# Altium PCB car_template 2020V3.PcbDoc (part 1 of 2)
Units mm, origin at the board's own origin, x right, y up, seen from the top; angles counter-clockwise.
Board outline 64 x 85 mm, 4 copper layers (Top Side, Ground Plane, Power Plane, Bottom Side), stack 0.844 mm thick; 154 components, 91 nets, 434 pads, 166 vias.
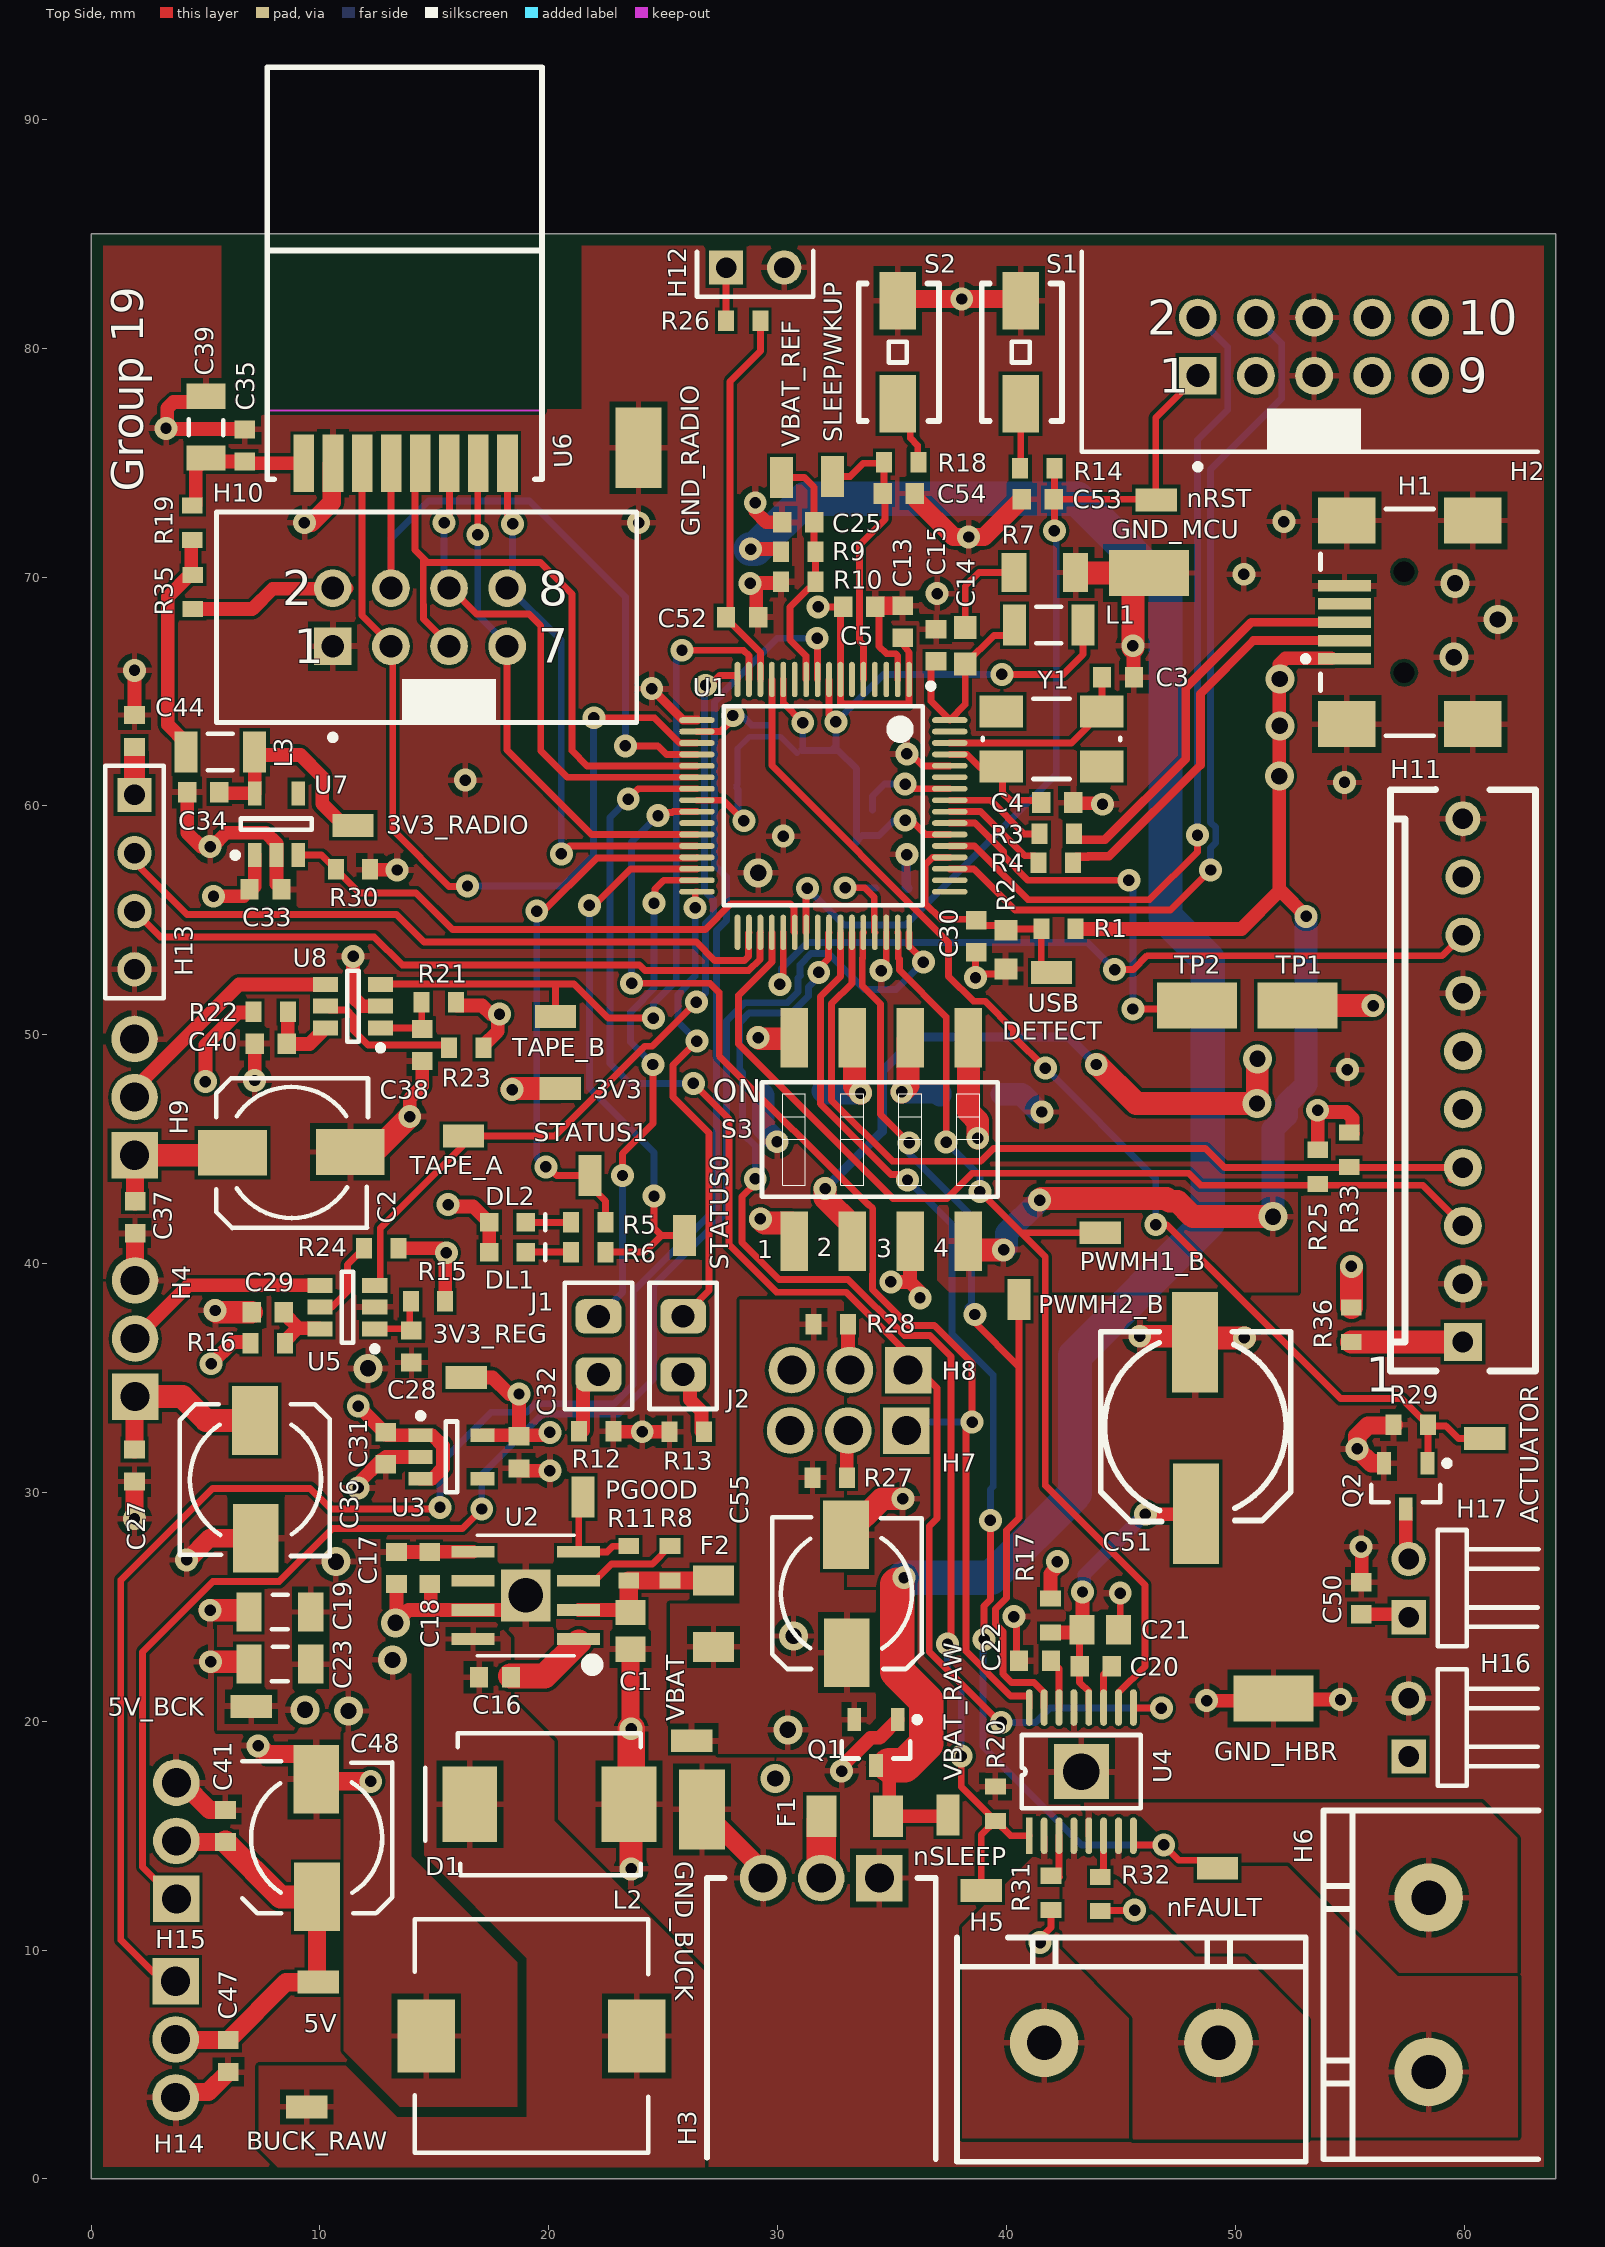
[diagram p0: Top Side view]
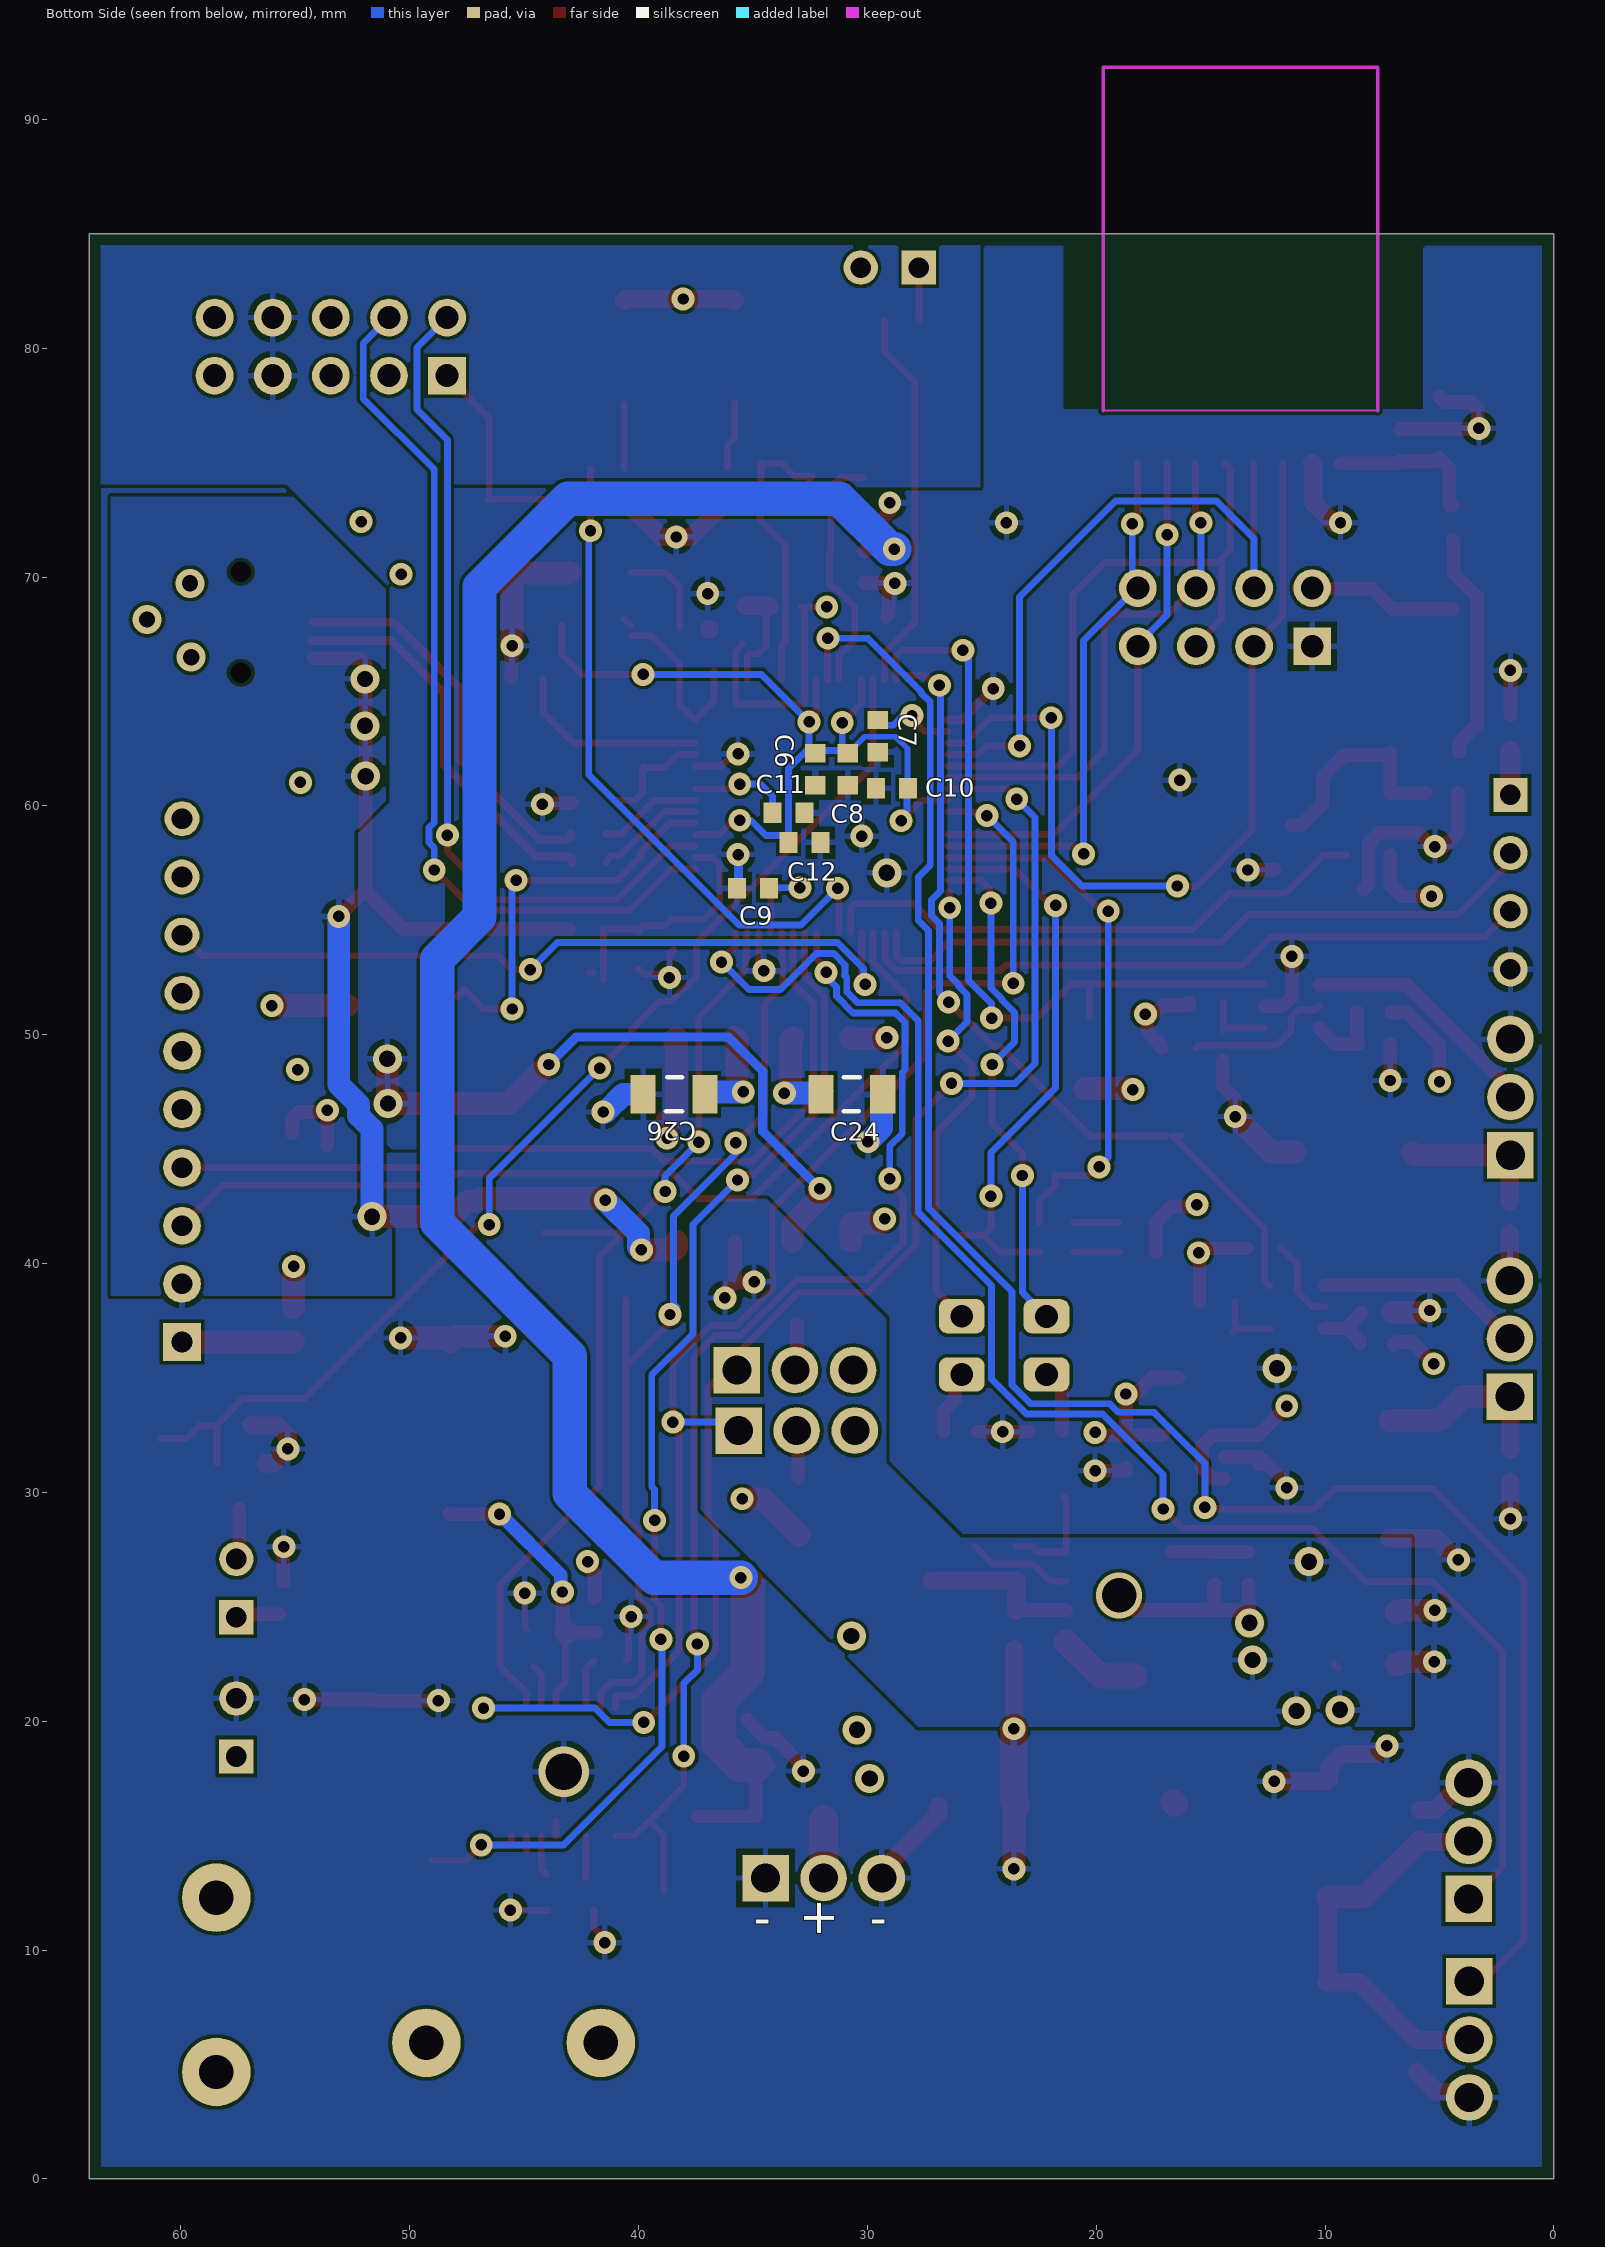
[diagram p1: Bottom Side view, seen from below]
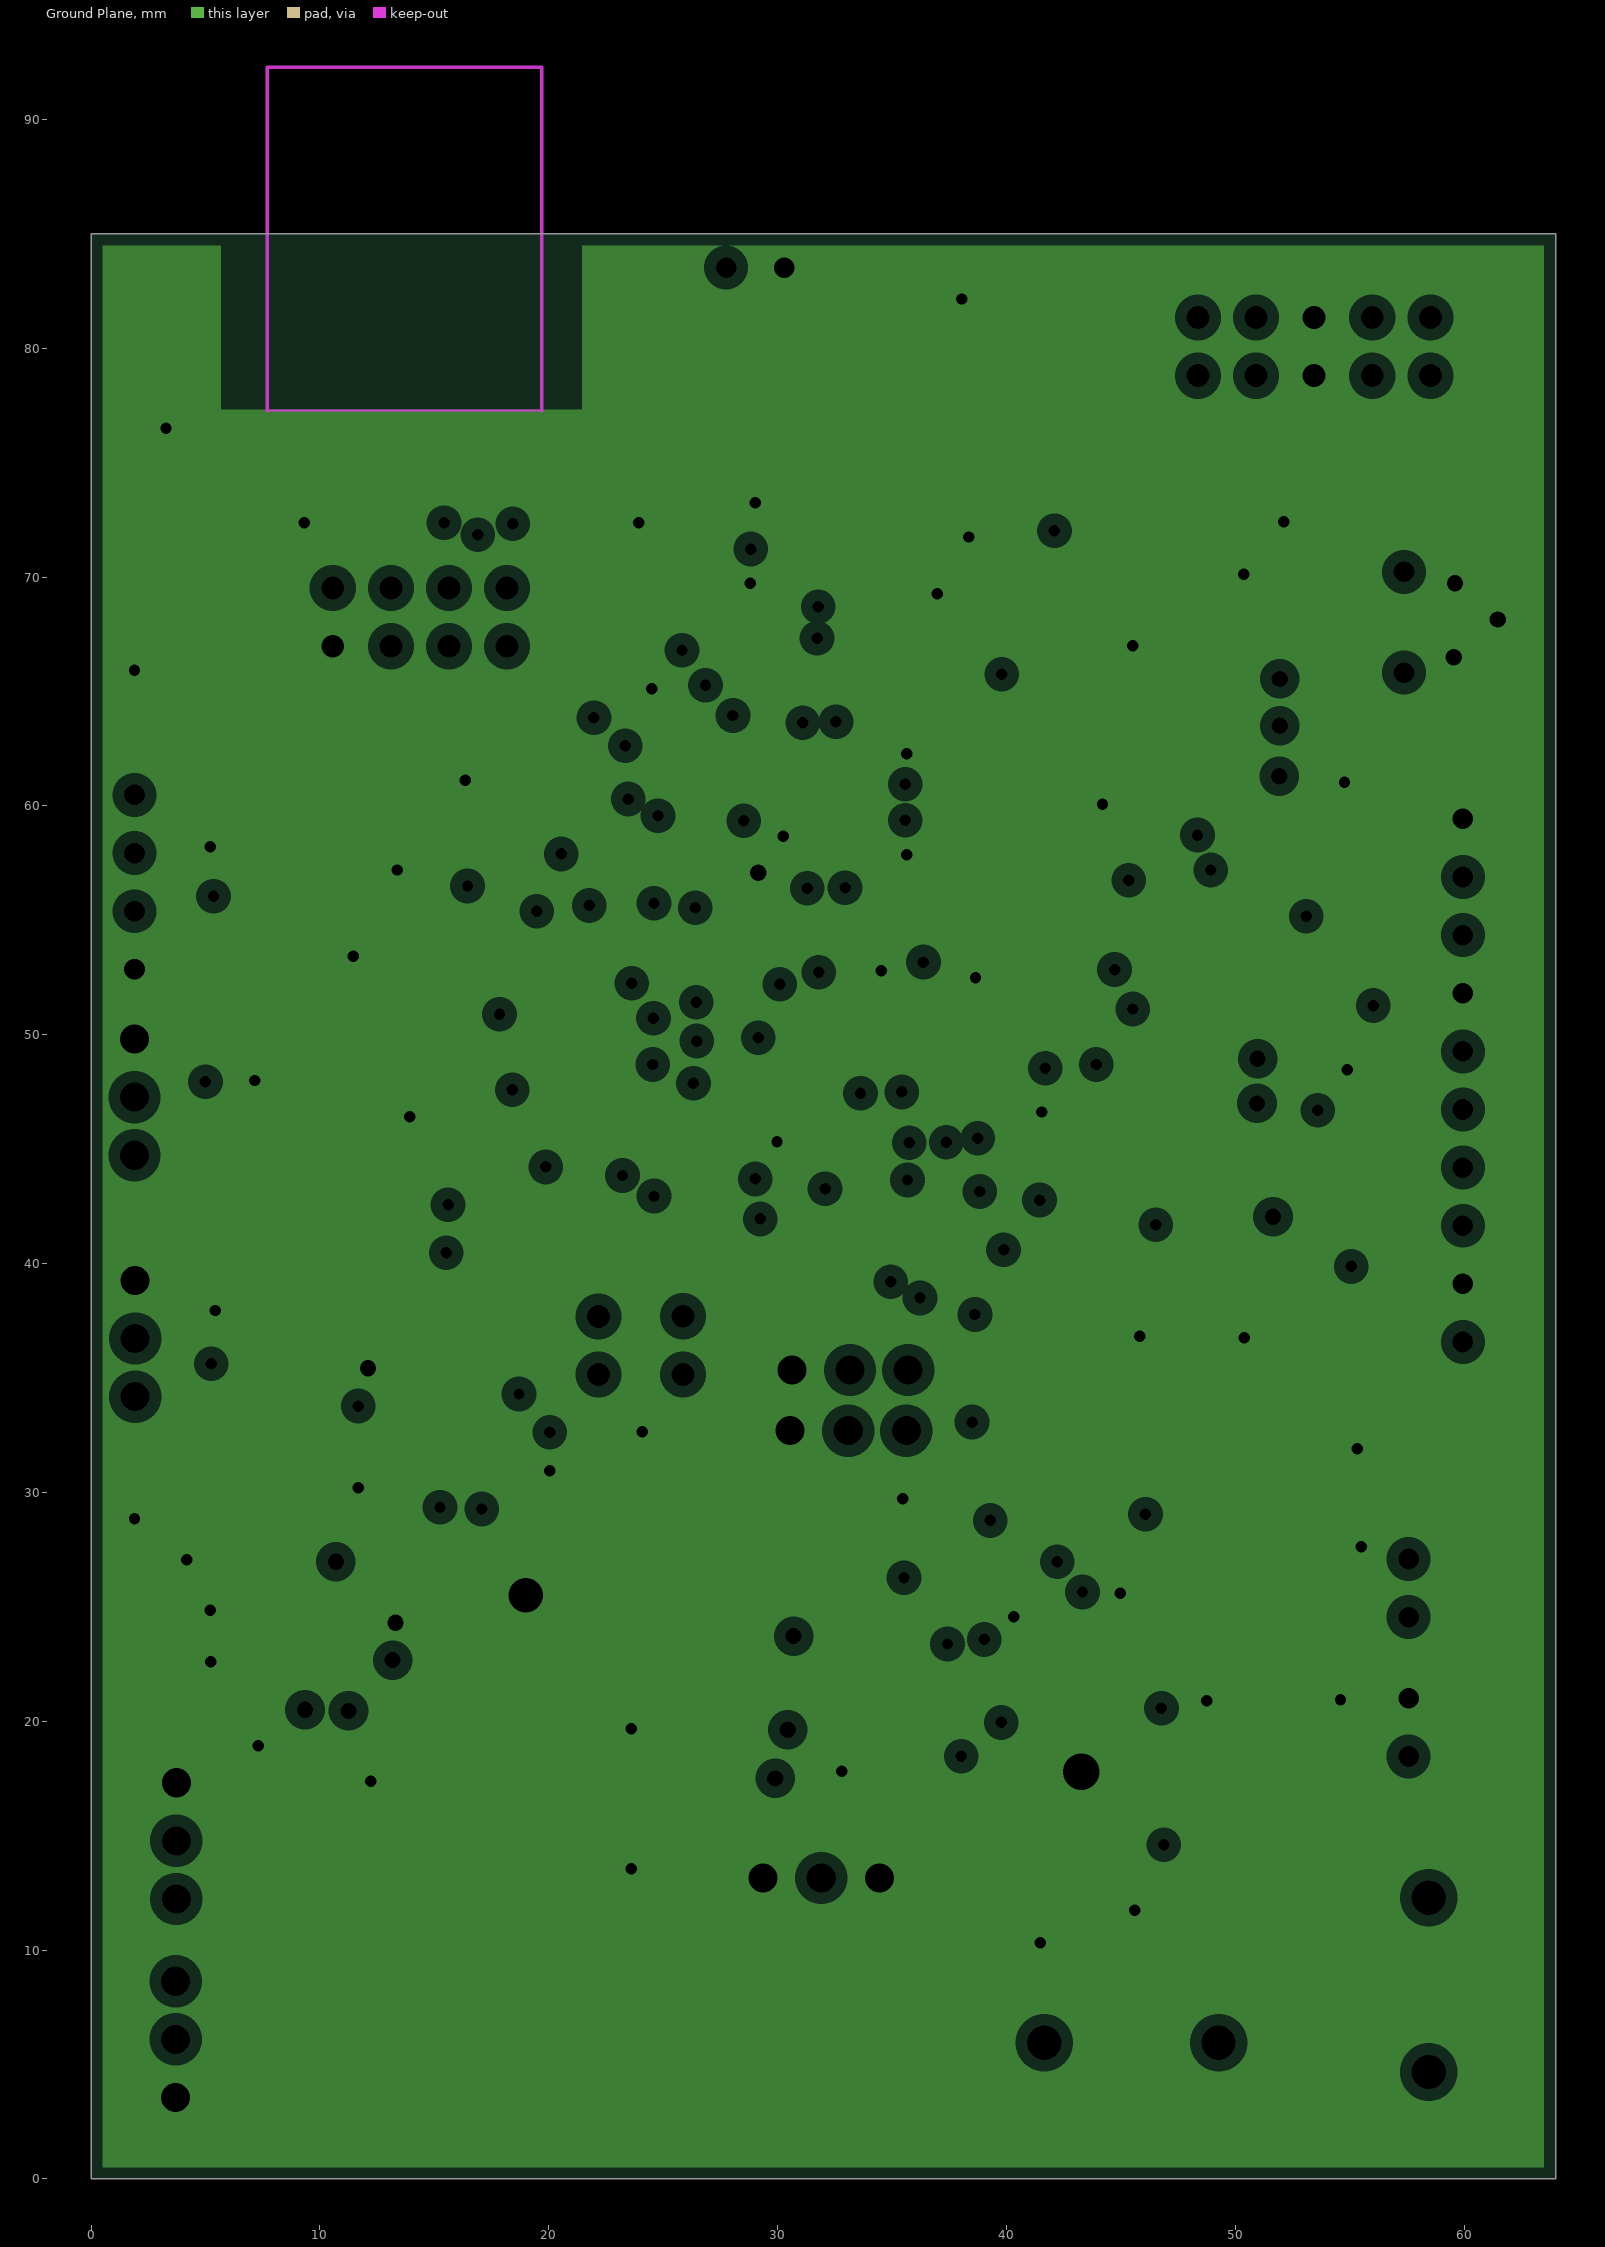
[diagram p2: Ground Plane, clearances drawn from the general rule]
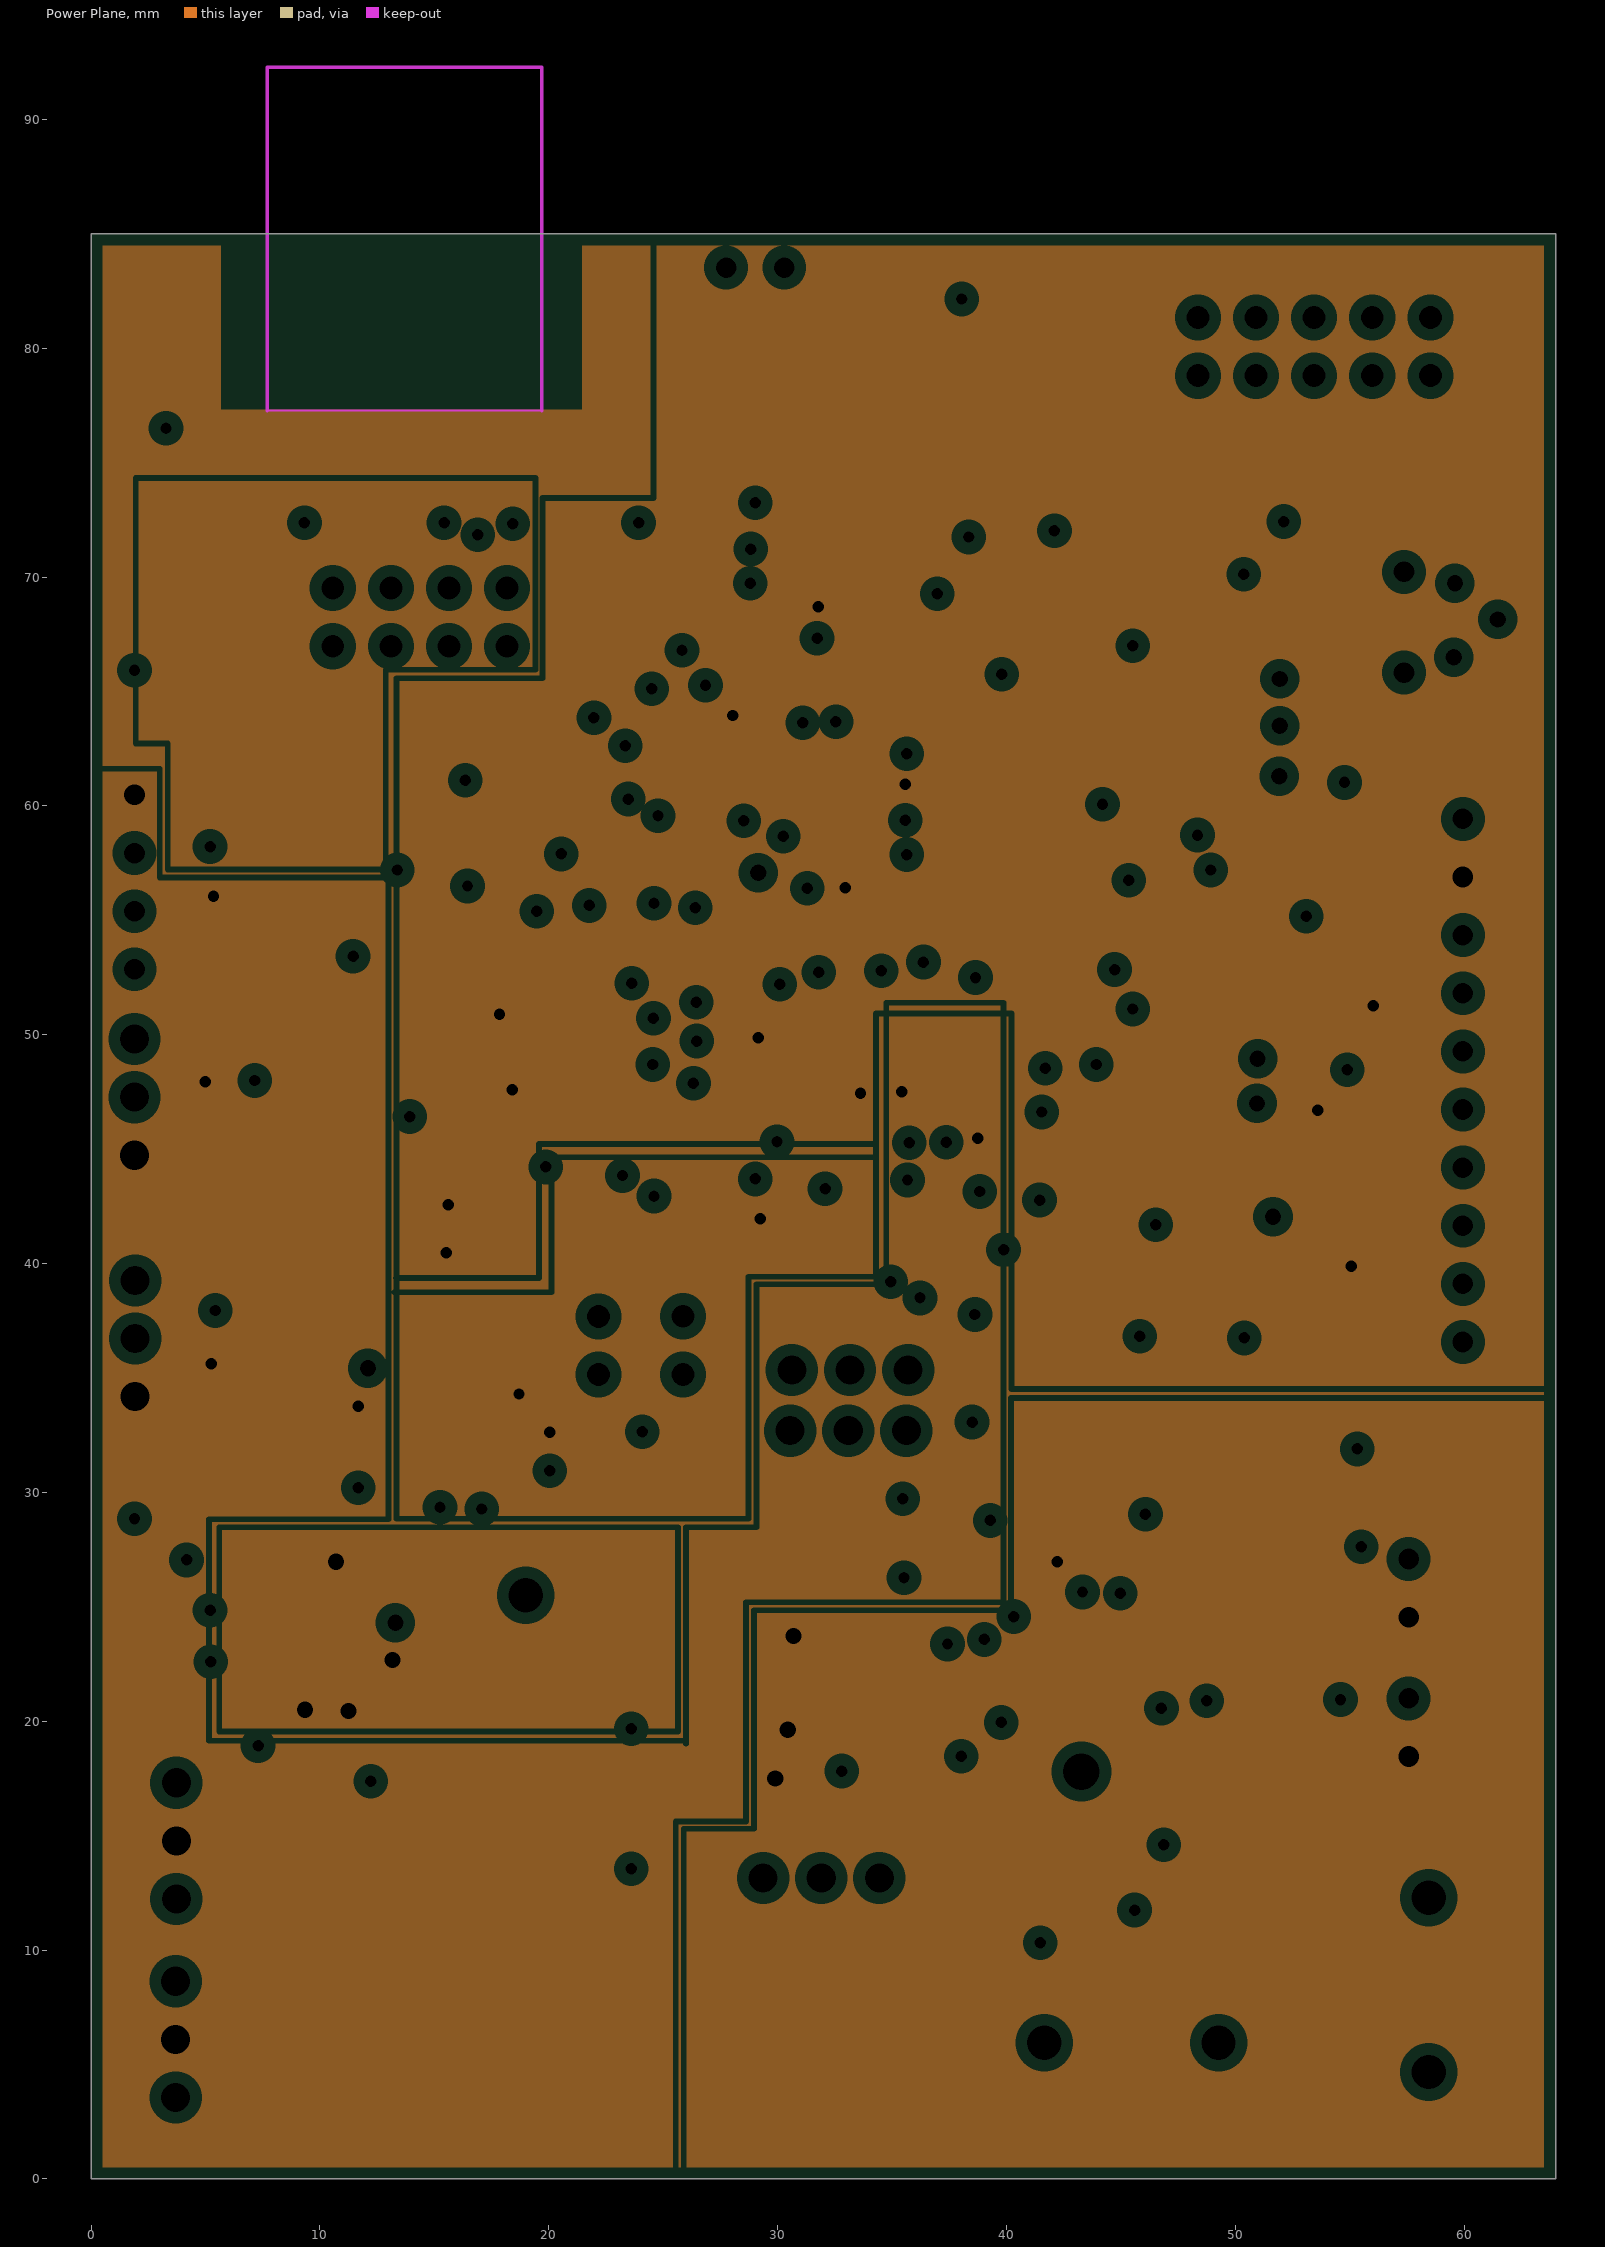
[diagram p3: Power Plane, clearances drawn from the general rule]

## Layer stack, top to bottom
Top Solder: solder mask 0.0102, Solder Resist, Dk 3.5
Top Side: signal copper 0.0356
Dielectric 1: core 0.32, FR-4, Dk 4.8
Ground Plane: plane copper 0.036, net GND
Dielectric 3: prepreg 0.127, Dk 4.2
Power Plane: plane copper 0.036, net (Multiple Nets)
Dielectric 4: core 0.254, Dk 4.2
Bottom Side: signal copper 0.0356
Bottom Solder: solder mask 0.0102, Solder Resist, Dk 3.5

## Board outline
0,85 64,85 64,0 0,0 0,85

## Design rules (kind name [scope] priority, off if disabled: settings)
BoardOutlineClearance [All] p1: gap=0.5 ignorepadtopadclearanceinfootprint=FALSE
Clearance Min_Clearance_Circuit_Labs [All] p1: gap=0.15 ignorepadtopadclearanceinfootprint=FALSE except(0: Arc-Hole Track-Hole SMDPad-Hole THPad-Hole Via-Hole Fill-Hole Poly-Hole Region-Hole Text-Hole)
DiffPairsRouting [All] p1: maxlimit=0.254 minlimit=0.254 mostfreqgap=0.254 toplayer_minwidth=0.381 toplayer_maxwidth=0.381 toplayer_prefwidth=0.381 bottomlayer_minwidth=0.381 bottomlayer_maxwidth=0.381 bottomlayer_prefwidth=0.381 maxuncoupledlength=12.7
FanoutControl Fanout_BGA [IsBGA] p1 off: bgadir=Out bgaviamode=Centered fanoutstyle=Auto fanoutdirection=Alternating viagrid=0.025 // Fanout_BGA (Default Rule)
HoleSize [All] p1: absolutevalues=TRUE maxlimit=10 minlimit=0.3 maxpercent=80.000 minpercent=20.000
MinimumAnnularRing [All] p1: minimumring=0.1
MinimumSolderMaskSliver [All] p1: minsoldermaskwidth=0.1
NetAntennae [All] p1: netantennaetolerance=1
PasteMaskExpansion [All] p1 off: expansion=0.2
PlaneClearance [All] p1: clearance=0.508
PlaneConnect [All] p1: planeconnectstyle=Relief reliefexpansion=0.508 reliefentries=4 reliefconductorwidth=0.254 reliefairgap=0.254
PolygonConnect [All] p1: connectstyle=Relief reliefconductorwidth=0.254 reliefentries=4 polygonreliefangle="90 Angle" airgapwidth=0.254
RoutingVias [All] p1: holewidth=0.5 width=1 viastyle="Through Hole" minholewidth=0.3 minwidth=0.6 maxholewidth=1 maxwidth=2
SMDNeckDown [All] p1 off: percent=50.000
SMDToCorner [All] p1: distance=98425
SMDToPlane [All] p1: distance=1968504
SilkToSolderMaskClearance SilkscreenOverComponentPads [IsPad] p1: minsilkscreentomaskgap=0.254 clearancetoexposedcopper=TRUE
SolderMaskExpansion [All] p1: expansion=0.102
ViasUnderSMD [All] p1: allowed=FALSE
Width [All] p1: maxlimit=2 minlimit=0.15 preferedwidth=0.3
21 further rules are at their usual default settings.

## Classes and differential pairs
component class U_SAM4S_MCU_Racer: ACTUATOR C2 C3 C4 C5 C6 C7 C8 C9 C10 C11 C12 C13 C14 C15 C25 C27 C28 C29 C30 C36 C37 C38 C40 C41 C44 C47 C48 C50 C52 C53 C54 DL1 DL2 GND_MCU H2 H4 H9 H12 H13 H14 H15 H17 J1 J2 L1 nRST Q2 R1 R2 R3 R4 R5 R6 R7 R9 R10 R12 R13 R14 R15 R16 R18 R21 R22 R23 R24 R26 R29 S1 S2 SLEEP/WKUP STATUS0 STATUS1 TAPE_A TAPE_B TP1 TP2 U1 U5 U8 USB VBAT_REF Y1
component class U_Radio: C35 C39 GND_RADIO H10 R19 R35 U6
component class U_Motor_Drivers: C20 C21 C22 C51 GND_HBR H5 H6 H7 H8 H16 nFAULT nSLEEP PWMH1_B PWMH2_B R17 R20 R27 R28 R31 R32 U4
component class U_IMU_MPU-9250: H11 R25 R33 R36
component class U_Battery_and_Power: 3V3 3V3_RADIO 3V3_REG 5V 5V_BCK BUCK_RAW C1 C16 C17 C18 C19 C23 C24 C26 C31 C32 C33 C34 C55 D1 F1 F2 GND_BUCK H3 L2 L3 PGOOD Q1 R8 R11 R30 U2 U3 U7 VBAT VBAT_RAW
differential pair D: +D_P -D_N

## Components (designator, comment, footprint, x,y, rotation, side; value= is the part's Value field where it differs from the comment)
3V3 "TP_0603" TP_0603 20.5,47.65 r180 top
3V3_RADIO "TP_0603" TP_0603 11.45,59.15 r0 top
3V3_REG "TP_0603" TP_0603 16.4,35.025 r0 top
5V "TP_0603" TP_0603 9.925,8.6 r0 top
5V_BCK "TP_0603" TP_0603 7,20.65 r180 top (schematic designator 5V_BUCK)
ACTUATOR "TP_0603" TP_0603 60.9,32.35 r180 top
BUCK_RAW "TP_0603" TP_0603 9.425,3.15 r0 top (schematic designator 5V_BUCK_RAW)
C1 "10uF" CAPC2012L 23.575,23.95 r90 top
C2 "100uF/16V" NICH-1 8.764,44.853 r180 top
C3 "27pF" CAPC1608L 44.875,65.625 r180 top
C4 "27pF" CAPC1608L 42.225,60.15 r180 top
C5 "100nF" CAPC1608L 33.575,68.7 r180 top
C6 "100nF" CAPC1608L 32.275,61.6 r270 bottom
C7 "100nF" CAPC1608L 29.55,63.05 r90 bottom
C8 "100nF" CAPC1608L 30.85,61.6 r270 bottom
C9 "100nF" CAPC1608L 35,56.4 r180 bottom
C10 "100nF" CAPC1608L 28.925,60.775 r0 bottom
C11 "100nF" CAPC1608L 33.45,59.7 r0 bottom
C12 "100nF" CAPC1608L 32.75,58.4 r180 bottom
C13 "100nF" CAPC1608L 35.475,68.05 r270 top
C14 "4.7uF" CAPC1608N 38.2,67 r270 top
C15 "100nF" CAPC1608L 36.925,67.025 r90 top
C16 "100nF" CAPC1608L 17.65,21.925 r180 top
C17 "100nF" CAPC1608L 13.35,26.7 r90 top
C18 "10nF" CAPC1608L 14.8,26.7 r90 top
C19 "22uF" CAPC3216L 8.25,24.775 r0 top
C20 "10nF" CAPC1608L 43.9,22.4 r180 top
C21 "10uF" CAPC2012L 44.1,24 r180 top
C22 "2.2uF" CAPC1608L 41.25,22.65 r0 top
C23 "22uF" CAPC3216L 8.25,22.5 r0 top
C24 "22uF" CAPC3216L 30.675,47.4 r0 bottom
C25 "100nF" CAPC1608L 30.9,72.4 r0 top
C26 "22uF" CAPC3216L 38.45,47.4 r180 bottom
C27 "100nF" CAPC1608L 1.9,31.175 r90 top
C28 "100nF" CAPC1608L 14,36.375 r90 top
C29 "100nF" CAPC1608L 7.725,37.875 r0 top
C30 "100nF" CAPC1608L 38.675,54.3 r90 top
C31 "1uF" CAPC1608L 12.875,31.925 r90 top
C32 "2.2uF" CAPC1608L 18.7,31.75 r90 top
C33 "1uF" CAPC1608L 7.625,56.35 r180 top
C34 "2.2uF" CAPC1608L 4.9,60.6 r0 top
C35 "100nF" CAPC1608L 6.725,75.75 r270 top
C36 "100uF/16V" NICH-1 7.178,30.561 r90 top
C37 "100nF" CAPC1608L 1.925,42.025 r90 top
C38 "100nF" CAPC1608L 14.475,49.55 r90 top
C39 "22uF" CAPC3216L 5.025,76.55 r270 top
C40 "100nF" CAPC1608L 7.85,49.6 r0 top
C41 "100nF" CAPC1608L 5.875,15.425 r270 top
C44 "100nF" CAPC1608L 1.9,63.275 r270 top
C47 "100nF" CAPC1608L 6,5.375 r90 top
C48 "100uF/16V" NICH-1 9.864,14.909 r270 top
C50 "100nF" CAPC1608L 55.5,25.375 r270 top
C51 "470uF/16V" PANA-F 48.275,32.875 r270 top
C52 "100nF" CAPC1608L 28.45,68.25 r180 top
C53 "100nF" CAPC1608L 41.375,73.4 r0 top
C54 "100nF" CAPC1608L 35.3,73.65 r180 top
C55 "100uF/16V" NICH-1 33.014,25.584 r270 top
D1 "#NAME?" SMC 20.025,16.375 r180 top
DL1 "#NAME?" WL-SMCW0603 19,40.5 r180 top
DL2 "#NAME?" WL-SMCW0603 19,41.8 r180 top
F1 "10A" RESC3216N 33.375,15.85 r0 top
F2 "2A" RESC3216N 27.2,24.7 r90 top
GND_BUCK "TP" TP_1206 26.7,16.15 r90 top
GND_HBR "TP" TP_1206 51.675,21 r0 top
GND_MCU "TP" TP_1206 46.225,70.175 r180 top
GND_RADIO "TP" TP_1206 23.925,75.65 r270 top
H1 "JS_USB_MINI_B" USB/SM0.8-6H5 62.625,68.025 r0 top
H2 "Header 5X2 Vert" IDC2.54-V10D 53.445,80.07 r0 top
H3 "Battery_HEADER_3pin" BATT_HEADER_3POS 31.91,13.15 r180 top
H4 "HEADER_3" HEADER_3POS 1.925,36.725 r90 top
H5 "TERM_BLK_2POS" TERM_BLK_2POS 41.65,5.95 r0 top
H6 "TERM_BLK_2POS" TERM_BLK_2POS 58.45,4.675 r90 top
H7 "HEADER_3" HEADER_3POS 33.09,32.7 r180 top
H8 "HEADER_3" HEADER_3POS 33.165,35.35 r180 top
H9 "HEADER_3" HEADER_3POS 1.9,47.275 r90 top
H10 "JA_HDR_IDC_4x2_VERT" IDC2.54-V08D 15.643,68.245 r0 top
H11 "External IMU" MOLEX_KK_10_HDR 59.95,36.575 r90 top
H12 "Header 2" HDR1X2 27.75,83.525 r0 top
H13 "Header 4" HDR1X4 1.9,60.48 r270 top
H14 "HEADER_3" HEADER_3POS 3.7,6.1 r270 top
H15 "HEADER_3" HEADER_3POS 3.725,14.775 r90 top
H16 "Header 2H" HDR1X2H 57.575,18.46 r90 top
H17 "Header 2H" HDR1X2H 57.575,24.55 r90 top
J1 "100Mil Jumper" JMP2.54 22.175,37.694 r270 top
J2 "100Mil Jumper" JMP2.54 25.875,37.7 r270 top
L1 "1A max, Idc 0.3R," INDC3216L 41.85,67.9 r0 top
L2 "IND 5.2UH 6A" INDUCTOR5u2 19.25,6.25 r180 top
L3 "1A max, Idc 0.3R" INDC3216L 5.65,62.35 r180 top
nFAULT "TP_0603" TP_0603 49.225,13.575 r0 top
nRST "TP_0603" TP_0603 46.55,73.375 r180 top
nSLEEP "TP_0603" TP_0603 38.9,12.6 r0 top
PGOOD "TP_0603" TP_0603 21.5,29.8 r90 top
PWMH1_B "TP_0603" TP_0603 44.1,41.35 r180 top
PWMH2_B "TP_0603" TP_0603 40.55,38.425 r90 top
Q1 "#NAME?" SOT23_L 34.3,19.075 r270 top
Q2 "#NAME?" SOT23_L 57.45,30.275 r270 top
R1 "27K" RESC1608L 42.275,54.625 r0 top
R2 "47K" RESC1608N 39.975,53.725 r90 top
R3 "27R" RESC1608L 42.2,58.775 r180 top
R4 "27R" RESC1608L 42.15,57.525 r180 top
R5 "1K" RESC1608L 21.725,41.8 r180 top
R6 "1K6" RESC1608L 21.725,40.5 r180 top
R7 "1R" RESC3216L 41.675,70.2 r180 top
R8 "0R" RESC1608L 25.3,26.9 r270 top
R9 "16K" RESC1608L 30.9,71.1 r180 top
R10 "10K" RESC1608L 30.9,69.8 r0 top
R11 "100K" RESC1608L 23.5,26.9 r270 top
R12 "3K" RESC1608L 22.075,32.675 r0 top
R13 "3K" RESC1608L 26.025,32.65 r180 top
R14 "3K" RESC1608L 41.35,74.75 r180 top
R15 "0R" RESC1608L 14.725,38.35 r180 top
R16 "0R" RESC1608L 7.725,36.525 r180 top
R17 "0R" RESC1608L 41.925,24.625 r90 top
R18 "3K" RESC1608L 35.4,75.025 r0 top
R19 "0R" RESC1608L 4.425,72.375 r270 top
R20 "10K" RESC1608L 39.525,16.4 r270 top
R21 "0R" RESC1608L 15.2,51.425 r180 top
R22 "0R" RESC1608L 7.85,51 r180 top
R23 "0R" RESC1608L 16.4,49.425 r0 top
R24 "0R" RESC1608L 12.675,40.675 r0 top
R25 "4K7" RESC1608L 53.6,44.225 r90 top
R26 "3K" RESC1608L 28.5,81.2 r180 top
R27 "0R" RESC1608L 32.275,30.65 r180 top
R28 "0R" RESC1608L 32.325,37.35 r180 top
R29 "10K" RESC1608L 57.675,32.95 r0 top
R30 "10K" RESC1608L 11.45,57.225 r180 top
R31 "0R" RESC1608L 41.95,12.5 r270 top
R32 "0R" RESC1608L 44.1,12.45 r270 top
R33 "4K7" RESC1608L 54.975,44.975 r90 top
R35 "0R" RESC1608L 4.45,69.35 r90 top
R36 "0R" RESC1608L 55.075,37.325 r90 top
S1 "EVQPNF05M" EVQPNF05M 40.625,79.825 r270 top
S2 "EVQPNF05M" EVQPNF05M 35.25,79.825 r270 top
S3 "WS_SW DIP-4" "DIP_SW_4WAY_SMD -" 30.72,40.975 r0 top
SLEEP/WKUP "TP_0603" TP_0603 32.4,74.4 r90 top
STATUS0 "TP_0603" TP_0603 25.925,41.225 r270 top
STATUS1 "TP_0603" TP_0603 21.8,43.85 r90 top
TAPE_A "TP_0603" TP_0603 16.275,45.575 r0 top
TAPE_B "TP_0603" TP_0603 20.3,50.8 r180 top
TP1 "3V3" TP_1206 52.725,51.275 r180 top value=TP
TP2 "Erase" TP_1206 48.325,51.275 r180 top value=TP
U1 "ATSAM4S8BA-ANR" LQFP64_L 32,60 r270 top locked
U2 "ADP2302ARDZ-5.0 BUCK" RD_8_1 19,25.5 r180 top locked value=Value
U3 "#NAME?" SOT95P280X145-5N 15.75,31.55 r0 top
U4 "DRV8833" HTSOP16 41,15 r90 top locked
U5 "SN74LVC1T45" SOT23-6_N 11.2,38.1 r180 top
U6 "nRF24 SMD" NRF24 7.7,74.275 r0 top locked
U7 "#NAME?" SOT95P280X145-5N 8.1,59.2 r90 top
U8 "SN74LVC1T45" SOT23-6_N 11.45,51.25 r180 top
USB "TP_0603" TP_0603 41.975,52.725 r0 top (schematic designator USB_DETECT)
VBAT "TP_0603" TP_0603 26.25,19.15 r180 top
VBAT_RAW "TP_0603" TP_0603 37.45,15.9 r90 top
VBAT_REF "TP_0603" TP_0603 30.175,74.35 r90 top
Y1 "12MHz" 6.0X3.5-4 41.975,62.925 r0 top

## Footprints (in the part's own frame and the unit in brackets; to place one, negate y for a bottom-side part, rotate by r counter-clockwise, add the part's x,y. Pads: shape width x height; smd on the part's side, far side on the other; paste and mask are expansions set on the pad)
6.0X3.5-4 [mm] "4 SMD 6.0X3.5 mm No Lead Crystal"
  rect 1.9x1.4 smd: 1(-2.2,-1.2) 2(2.2,-1.2) 3(2.2,1.2) 4(-2.2,1.2)
  silkscreen extent -3,-1.75 3,1.75, body extent -3,-1.75 3,1.75, height 1.2
BATT_HEADER_3POS [mil]
  rect 80x80 hole 50: 1(-100,0)
  round 80 hole 50: 2(0,0) 3(100,0)
  silkscreen extent -197,0 197,483
CAPC1608L [mm] "Chip Capacitor, Body 1.6x0.8mm, IPC High Density"
  rect 0.8x0.9 smd: 1(-0.7,0) 2(0.7,0)
  body extent -0.87,-0.48 0.87,0.48, height 0.85
CAPC1608N [mm] "Chip Capacitor, Body 1.6x0.8mm, IPC Medium Density"
  rect 1x1 smd: 1(-0.8,0) 2(0.8,0)
  body extent -0.87,-0.48 0.87,0.48, height 0.85
CAPC2012L [mm] "Chip Capacitor, Body 2.0x1.3mm, IPC High Density"
  rect 1.1x1.3 smd: 1(-0.8,0) 2(0.8,0)
  body extent -1.1,-0.72 1.1,0.72, height 1.1
CAPC3216L [mm] "Chip Capacitor, Body 3.2x1.6mm, IPC High Density"
  rect 1.1x1.7 smd: 1(-1.35,0) 2(1.35,0)
  silkscreen extent -0.35,-0.75 0.35,0.75, body extent -1.7,-0.9 1.7,0.9, height 1.35
"DIP_SW_4WAY_SMD -" [mm] "DIP Switch; 8 Leads"
  rect 1.2x2.6 smd: 1(0,0) 2(2.54,0) 3(5.08,0) 4(7.62,0) 5(7.62,8.89) 6(5.08,8.9) 7(2.54,8.9) 8(0,8.9)
  silkscreen extent -1.4,1.95 8.9,6.95
EVQPNF05M [mm] "Panansonic light touch SMD push button switch"
  rect 2.5x1.6 smd: 1(-2.25,0) 2(2.25,0)
  silkscreen extent -3,-1.7 3,1.8, body extent -3,-1.7 3,1.8, height 5
HDR1X2 [mm] "Connector; Header; 2 Position"
  rect 1.5x1.5 hole 0.9: 1(0,0)
  round 1.5 hole 0.9: 2(2.54,0)
  silkscreen extent -1.27,-1.27 3.81,0.72
HDR1X2H [mm] "Connector; Header; 2 Position; Right Angle"
  rect 1.5x1.5 hole 0.9: 1(0,0)
  round 1.5 hole 0.9: 2(2.54,0)
  silkscreen extent -1.27,-5.65 3.81,-1.27
HDR1X4 [mm] "Connector; Header; 4 Position"
  rect 1.5x1.5 hole 0.9: 1(0,0)
  round 1.5 hole 0.9: 2(2.54,0) 3(5.08,0) 4(7.62,0)
  silkscreen extent -1.27,-1.27 8.89,1.27
HEADER_3POS [mil]
  rect 80x80 hole 50: 1(-100,0)
  round 80 hole 50: 2(0,0) 3(100,0)
HTSOP16 [mm]
  rect 1.6x0.3 smd: 1(0,0)
  oval 1.6x0.3 smd: 2(0,-0.65) 3(0,-1.3) 4(0,-1.95) 5(0,-2.6) 6(0,-3.25) 7(0,-3.9) 8(0,-4.55) 9(5.6,-4.55) 10(5.6,-3.9) 11(5.6,-3.25) 12(5.6,-2.6) 13(5.6,-1.95) 14(5.6,-1.3) 15(5.6,-0.65) 16(5.6,0)
  rect 2.4x2.4 smd paste-0.5: 17(2.8,-2.275)
  silkscreen extent 1.2,-4.88 4.4,0.33
IDC2.54-V08D [mm] "Connector; IDC, Low Profile Male Header, Thru-Hole; 10 Position; Vertical; Pitch 2.54 mm; Body 20.32 x 9.2 x 9.45 mm (LxWxH)"
  rect 1.65x1.65 hole 1: 1(-5.08,-1.27)
  round 1.65 hole 1: 2(-5.08,1.27) 3(-2.54,-1.27) 4(-2.54,1.27) 5(0,-1.27) 6(0,1.27) 7(2.54,-1.27) 8(2.54,1.27)
  silkscreen extent -10.16,-5.37 8.2,4.6, body extent -9.97,-4.4 7.4,4.87, height 9.39
IDC2.54-V10D [mm] "Connector; IDC, Low Profile Male Header, Thru-Hole; 10 Position; Vertical; Pitch 2.54 mm; Body 20.32 x 9.2 x 9.45 mm (LxWxH)"
  rect 1.65x1.65 hole 1: 1(-5.08,-1.27)
  round 1.65 hole 1: 2(-5.08,1.27) 3(-2.54,-1.27) 4(-2.54,1.27) 5(0,-1.27) 6(0,1.27) 7(2.54,-1.27) 8(2.54,1.27) 9(5.08,-1.27) 10(5.08,1.27)
  silkscreen extent -10.16,-5.37 9.78,4.16, body extent -10.16,-4.6 10.16,4.6, height 9.45
INDC3216L [mm] "Chip Inductor, Body 3.2x1.6mm, IPC High Density"
  rect 1x1.8 smd: 1(-1.5,0) 2(1.5,0)
  silkscreen extent -0.55,-0.8 0.55,0.8, body extent -1.75,-0.95 1.75,0.95, height 1.9
INDUCTOR5u2 [mm]
  rect 2.5x3.2 smd: 1(-4.6,0) 2(4.6,0)
  silkscreen extent -5.1,-5.1 5.1,5.1
JMP2.54 [mm] "Jumper Change over 2.54mm"
  rrect50% 1.5x2 hole 1: 1(0,0) 2(2.544,0)
  silkscreen extent -1.47,-1.47 4.05,1.47, body extent -1.43,-1.43 4.05,1.43, height 8.45
LQFP64_L [mm] "Thin QFP, 64-Leads, Body 10x10mm, Pitch 0.5mm, IPC High Density"
  oval 1.55x0.25 smd mask+0.07: 1(-5.525,3.75) 2(-5.525,3.25) 3(-5.525,2.75) 4(-5.525,2.25) 5(-5.525,1.75) 6(-5.525,1.25) 7(-5.525,0.75) 8(-5.525,0.25) 9(-5.525,-0.25) 10(-5.525,-0.75) 11(-5.525,-1.25) 12(-5.525,-1.75) 13(-5.525,-2.25) 14(-5.525,-2.75) 15(-5.525,-3.25) 16(-5.525,-3.75) 33(5.525,-3.75) 34(5.525,-3.25) 35(5.525,-2.75) 36(5.525,-2.25) 37(5.525,-1.75) 38(5.525,-1.25) 39(5.525,-0.75) 40(5.525,-0.25) 41(5.525,0.25) 42(5.525,0.75) 43(5.525,1.25) 44(5.525,1.75) 45(5.525,2.25) 46(5.525,2.75) 47(5.525,3.25) 48(5.525,3.75)
  oval 0.25x1.55 smd mask+0.07: 17(-3.75,-5.525) 18(-3.25,-5.525) 19(-2.75,-5.525) 20(-2.25,-5.525) 21(-1.75,-5.525) 22(-1.25,-5.525) 23(-0.75,-5.525) 24(-0.25,-5.525) 25(0.25,-5.525) 26(0.75,-5.525) 27(1.25,-5.525) 28(1.75,-5.525) 29(2.25,-5.525) 30(2.75,-5.525) 31(3.25,-5.525) 32(3.75,-5.525) 49(3.75,5.525) 50(3.25,5.525) 51(2.75,5.525) 52(2.25,5.525) 53(1.75,5.525) 54(1.25,5.525) 55(0.75,5.525) 56(0.25,5.525) 57(-0.25,5.525) 58(-0.75,5.525) 59(-1.25,5.525) 60(-1.75,5.525) 61(-2.25,5.525) 62(-2.75,5.525) 63(-3.25,5.525) 64(-3.75,5.525)
  silkscreen extent -5.36,-4.35 4.35,4.82, body extent -5,-5 5,5, height 1.6
MOLEX_KK_10_HDR [mil] "MOLEX_KK_10_HDR"
  rect 65x65 hole 35.43: 1(0,0)
  round 65 hole 35.43: 2(100,0) 3(200,0) 4(300,0) 5(400,0) 6(500,0)
  round 60 hole 35.43: 7(600,0) 8(700,0) 9(800,0) 10(900,0)
  silkscreen extent -50,-125 951,125, body extent -44,-120 944,120, height 630
NICH-1 [mm] "Electrolytic capacitor"
  rect 3x2 smd: 1(-2.561,-0.022) 2(2.584,0.011)
  silkscreen extent -3.34,-3.25 3.3,3.3, body extent -3.2,-3.2 3.2,3.2, height 5.3
NRF24 [mm]
  rect 0.9x2.5 smd: 1(1.6,0.7) 2(2.871,0.7) 3(4.143,0.7) 4(5.414,0.7) 5(6.686,0.7) 6(7.957,0.7) 7(9.229,0.7) 8(10.5,0.7)
  Keep-Out Layer lines w0.1: 0,3 12,3
  Keep-Out Layer lines w0.15: 0,3 0,18 12,18 12,3
  silkscreen extent 0,0 12,18
PANA-F [mm] "Panasonic FP Case Size F"
  rect 4.4x2 smd: 1(-3.694,-0.029) 2(3.801,0.004)
  silkscreen extent -4.15,-4.15 4.15,4.15, body extent -4.15,-4.15 4.15,4.15, height 10
RD_8_1 [mil]
  rect 74x20 smd paste+0 mask+0: 1(-91,75) 2(-91,25) 3(-91,-25) 4(-91,-75) 5(91,-75) 6(91,-25) 7(91,25) 8(91,75)
  rect 84.65x90 smd paste-44.5 mask+0: EPAD(0,0)
  silkscreen extent -118,-104 84,123, body extent 0,0 10,10, height 10
RESC1608L [mm] "Chip Resistor, Body 1.6x0.8mm, IPC High Density"
  rect 0.7x0.9 smd: 1(-0.75,0) 2(0.75,0)
  body extent -0.85,-0.48 0.85,0.48, height 0.9
RESC1608N [mm] "Chip Resistor, Body 1.6x0.8mm, IPC Medium Density"
  rect 0.9x1 smd: 1(-0.85,0) 2(0.85,0)
  body extent -0.85,-0.48 0.85,0.48, height 0.6
RESC3216L [mm] "Chip Resistor, Body 3.1x1.6mm, IPC High Density"
  rect 1.1x1.7 smd: 1(-1.35,0) 2(1.35,0)
  body extent -1.68,-0.87 1.68,0.87, height 2.54
RESC3216N [mm] "Chip Resistor, Body 3.2x1.6mm, IPC Medium Density"
  rect 1.3x1.8 smd: 1(-1.45,0) 2(1.45,0)
  body extent -1.68,-0.87 1.68,0.87, height 0.71
SMC [mm] "DO-214-AB/SMC; 2 C-Bend Leads; Body 7.9 x 5.9 mm, inc. leads (LxW)"
  rect 2.4x3.3 smd: 1(-3.475,0) 2(3.475,0)
  silkscreen extent -4,-3.1 5.43,3.1
SOT23-6_N [mm]
  rect 1.1x0.65 smd: 1(-1.2,0.95) 2(-1.2,0) 3(-1.2,-0.95) 4(1.2,-0.95) 5(1.2,0) 6(1.2,0.95)
  silkscreen extent -1.33,-1.55 0.25,1.95, body extent -0.9,-1.55 0.9,1.55, height 1.45
SOT23_L [mm] "SOT23, 3-Leads, Body 2.9x1.3mm, Pitch 0.95mm, Lead Span 2.3mm, IPC High Density"
  rect 1x0.6 smd: 1(-1,0.95) 2(-1,-0.95) 3(1,0)
  silkscreen extent -1.12,-1.5 0.7,1.93, body extent -0.7,-1.5 0.7,1.5, height 1.1
SOT95P280X145-5N [mm] "SOT23, 5-Leads, Body 2.90x2.80mm, Pitch 0.95mm, IPC Medium Density"
  rect 1.05x0.6 smd: 1(-1.35,0.95) 2(-1.35,0) 3(-1.35,-0.95) 4(1.35,-0.95) 5(1.35,0.95)
  silkscreen extent -1.47,-1.55 0.25,1.92, body extent -0.87,-1.52 0.87,1.53, height 1.45
TERM_BLK_2POS [mm]
  round 3 hole 1.5: 1(0,0) 2(7.62,0)
  silkscreen extent -3.81,-5.2 11.43,4.6
TP_0603 [mm] "TestPoint 0603"
  rect 1.8x1 smd: 1(0,0)
  body extent -1,-0.6 1,0.6, height 0.9
TP_1206 [mm] "Test Point Pad"
  rect 3.5x2 smd: 1(0,0)
  body extent -1.62,-0.85 1.63,0.8, height 2
USB/SM0.8-6H5 [mm] "Connector; USB2.0, Type B, SM; 5 Position; Right Angle"
  rect 2.3x0.5 smd mask+0.07: 1(-7.85,-1.6) 2(-7.85,-0.8) 3(-7.85,0) 4(-7.85,0.8) 5(-7.85,1.6)
  rect 2.5x2 smd: 6(-7.75,4.45) 7(-2.25,4.45) 8(-7.75,-4.45) 9(-2.25,-4.45)
  round 0.6 hole 0.9 unplated: MH1(-5.25,2.2) MH2(-5.25,-2.2)
  silkscreen extent -9.67,-4.95 -3.95,4.95, body extent -8.9,-4.95 0.7,4.95, height 3.9
WL-SMCW0603 [mm] "2.4 x 0.8 x 0.7mm LED"
  rect 0.8x0.8 smd: 1(0,0) 2(1.6,0)
  silkscreen extent -0.85,-0.35 -0.85,0.35

## Part data
3V3 3V3_RADIO 3V3_REG 5V 5V_BCK ACTUATOR BUCK_RAW nFAULT nRST nSLEEP PGOOD PWMH1_B PWMH2_B SLEEP/WKUP STATUS0 STATUS1 TAPE_A TAPE_B USB VBAT VBAT_RAW VBAT_REF: "Test Point 1.65X0.9X1.2mm SMD", Manufacturer="TE Connectivity AMP Connectors", Manufacturer Part Number=1625854-3, Supplier Part Number 1=A106145CT-ND, Mounting Type="Surface Mount", Supplier 1=Digi-Key, Terminal="0.063\" x 0.031\" x 0.045\" (1.60mm x 0.80mm x 1.15mm)", Type="PC Test Point"
C1 C21: library part CC_10uF_0805_10V, "CAP CER 10uF X7R +-20% 10V 0805", Max Voltage=10V, Code_IPC=2012[0805], Note="Footprint corresponds to dimensions for bulk cassette packaging. This case size has tightened tolerances.", PackageReference=0805, Storage Location="PCB Assembly WS", Supplier="ECE Dept"
C2 C36 C48 C55: library part CA_100uF_16V, "CAP ALUM 100uF 16V SMD", Manufacturer=Nichcon, Manufacturer PN=UWX1C101MCL1GB, Supplier Part Number 1=1870677, Storage Location="PCB Assembly WS", Supplier="ECE Dept", Supplier 1=Farnell, Supplier 2=Digi-Key, Supplier Part Number 2=493-2105-1-ND
C3 C4: library part CC_27pF_0603, "CAP CER 27pF NPO/COG +-5% 50V 0603", Code_IPC="1608 [0603]", PackageReference=0603, Storage Location="PCB Assembly WS", Supplier="ECE Dept"
C5 C6 C7 C8 C9 C10 C11 C12 C13 C15 C16 C17 C25 C27 C28 C29 C30 C35 C37 C38 C40 C41 C44 C47 C50 C52 C53 C54: library part CC_100nF_0603, "CAP CER 100nF X7R +-10% 50V 0603", Code_IPC="1608 [0603]", PackageReference=0603, Storage Location="PCB Assembly WS", Supplier="ECE Dept"
C14: library part CC_4.7uF_0603, "CAP CER 4.7uF X5R +-20%  10V 0603", Max Voltage=10V, Code_IPC=2012[0805], Note="Footprint corresponds to dimensions for bulk cassette packaging. This case size has tightened tolerances.", PackageReference=0805, Storage Location="PCB Assembly WS", Supplier="ECE Dept"
C18 C20: library part CC_10nF_0603, "CAP CER 10nF X7R +-10% 50V 0603", Code_IPC="1608 [0603]", PackageReference=0603, Storage Location="PCB Assembly WS", Supplier="ECE Dept"
C19 C23 C24 C26 C39: library part CC_22uF_1206, "CAP CER 22uF Y5V -20% +80% 10V 1206", Dielectric=Y5V, Max Voltage=10V, Storage Location="PCB Assembly WS", Supplier="ECE Dept"
C22 C32 C34: library part CC_2.2uF_0603, "CAP CER 2.2uF X5R +-20% 10V 0603", Max Voltage=10V, Code_IPC="1608 [0603]", PackageReference=0603, Storage Location="PCB Assembly WS", Supplier="ECE Dept"
C31 C33: library part CC_1uF_0603, "CAP CER 1uF Y5V -20% +80% 16V 0603", Max Voltage=16V, Code_IPC="1608 [0603]", PackageReference=0603, Storage Location="PCB Assembly WS", Supplier="ECE Dept"
C51: library part CA_470uF_16V, "CAP ALUM 470uF 16V SMD", Capacitance=470uF, Case/Package=Radial, ESR (Equivalent Series Resistance)=80mR, Leakage Current=75.2uA, Manufacturer=Panasonic, Manufacturer Part Number=EEE-FP1C471AP, Manufacturer PN=EEEFP1C471AP, Max Operating Temperature=105°C, Min Operating Temperature=-55°C, Package Quantity=1, Ripple Current=850mA, Supplier Part Number 1=PCE4436CT-ND, Tolerance=20%, Voltage=16V, ComponentLink1Description=https://datasheet.ciiva.com/3773/45975129s8826661n1386-3773653.pdf, ComponentLink1URL=https://datasheet.ciiva.com/3773/45975129s8826661n1386-3773653.pdf, ComponentLink2Description=https://datasheet.ciiva.com/16393/aba0000ce114-16393093.pdf, ComponentLink2URL=https://datasheet.ciiva.com/16393/aba0000ce114-16393093.pdf, ComponentLink3Description=https://datasheet.ciiva.com/46385/370232-46385781.pdf, ComponentLink3URL=https://datasheet.ciiva.com/46385/370232-46385781.pdf, ComponentLink4Description=https://datasheet.ciiva.com/24072/aba0000ce114-40714-24072630.pdf, ComponentLink4URL=https://datasheet.ciiva.com/24072/aba0000ce114-40714-24072630.pdf, ComponentLink5Description=https://datasheet.ciiva.com/14607/70068195-14607368.pdf, ComponentLink5URL=https://datasheet.ciiva.com/14607/70068195-14607368.pdf, ComponentLink6Description=https://datasheet.ciiva.com/46376/370232-46376729.pdf, ComponentLink6URL=https://datasheet.ciiva.com/46376/370232-46376729.pdf, ComponentLink7Description=https://datasheet.ciiva.com/2985/aba0000ce114-2985530.pdf, ComponentLink7URL=https://datasheet.ciiva.com/2985/aba0000ce114-2985530.pdf, ComponentLink8Description=https://datasheet.ciiva.com/11777/0900766b80df09a1-11777354.pdf, ComponentLink8URL=https://datasheet.ciiva.com/11777/0900766b80df09a1-11777354.pdf, ComponentLink9Description=https://datasheet.ciiva.com/43455/370232-43455019.pdf, ComponentLink9URL=https://datasheet.ciiva.com/43455/370232-43455019.pdf, ComponentLink10Description=https://datasheet.ciiva.com/17353/aba0000ce114-17353676.pdf, ComponentLink10URL=https://datasheet.ciiva.com/17353/aba0000ce114-17353676.pdf, ComponentLink11Description=https://datasheet.ciiva.com/25614/0900766b80df09a1-25614237.pdf, ComponentLink11URL=https://datasheet.ciiva.com/25614/0900766b80df09a1-25614237.pdf, ComponentLink12Description=https://datasheet.ciiva.com/46387/370232-46387919.pdf, ComponentLink12URL=https://datasheet.ciiva.com/46387/370232-46387919.pdf, ComponentLink13Description=https://datasheet.ciiva.com/29313/444562-da-01-en-smd-elko-eeefp1c471ap-470uf-16v-105-29313908.pdf, ComponentLink13URL=https://datasheet.ciiva.com/29313/444562-da-01-en-smd-elko-eeefp1c471ap-470uf-16v-105-29313908.pdf, Contact Plating=Tin, Diameter=8mm, Height=10.2mm, Height - Seated (Max)=0.402inch, Lead Free="Lead Free", Lead Pitch=3.1mm, Length=10.5mm, Life (Hours)=2000Hour, Material=Aluminium, Mount="Surface Mount,PCB", Number of Pins=2, Packaging="Tape and Reel", Radiation Hardening=No, REACH SVHC="No SVHC", Ripple Current (AC)=850mA, Storage Location="PCB Assembly WS", Supplier="ECE Dept", Supplier 1=Digi-Key, Supplier 2=Farnell, Supplier Part Number 2=1539508, Termination=SMD/SMT, Voltage Rating=16V, Voltage Rating (DC)=16V, Width=8.3mm
D1: library part DS_VS-30BQ015-M3, "DIODE, SCHOTTKY, 3A, 15V, DO-214AB / SMC", Average Rectified Current=3A, Forward Voltage=350mV, Manufacturer="Vishay Semiconductors", Manufacturer Part Number=VS-30BQ015-M3/9AT, Max Forward Surge Current (Ifsm)=650A, Max Reverse Voltage (DC)=15V, Peak Reverse Current=4mA, Supplier Part Number=VS-30BQ015-M3/9AT-ND, Supplier Part Number 1=VS-30BQ015-M3/9ATGIDKR-ND, ComponentLink1Description=https://datasheet.ciiva.com/36181/vs-30bq015-m3-9at-36181258.pdf, ComponentLink1URL=https://datasheet.ciiva.com/36181/vs-30bq015-m3-9at-36181258.pdf, Supplier=Digi-Key, Supplier 1=Digi-Key, Supplier 2=Element14, Supplier Part Number 2=2628288
DL1: library part DL_150060RS75000, "LED Red 250mcd 0603 SMD", Forward Current If=30, Forward Voltage=2, LED Colour=Red, Manufacturer="WURTH ELEKTRONIK", Manufacturer Part Number=150060RS75000, Supplier Part Number 1=2322071, LED Mounting=SMD, Lens Shape=Rectangular, Luminous Intensity=250, Storage Location="PCB Assembly WS", Supplier="ECE Dept", Supplier 1=Farnell, Viewing Angle=140°, Wavelength Typ=625
DL2: library part DL_150060GS75000, "LED Dk Green 430mcd 0603 SMD", Forward Current If=30, Forward Voltage=3.2, LED Colour="Dark Green", Manufacturer="WURTH ELEKTRONIK", Manufacturer Part Number=150060GS75000, Supplier Part Number 1=2322070, LED Mounting=SMD, Lens Shape=Rectangular, Luminous Intensity=430, Storage Location="PCB Assembly WS", Supplier="ECE Dept", Supplier 1=Farnell, Viewing Angle=140°, Wavelength Typ=520
F1: library part FS_Fuse_10A, "Fuse 10A Fast Acting 1206 SMD", Fuse Case Style=1206, Fuse Current=10, Manufacturer="Eaton Bussmann", Manufacturer Part Number=TR/3216FF10-R, Supplier Part Number 1=TR/3216FF10-R-ND, Voltage Rating (AC)=32V, Voltage Rating (DC)=24V, Blow Characteristic="Fast Acting", Current Rating=10A, Device Marking=10, Fuse Type Blowing Characteristic="Fast Acting", Storage Location="PCB Assembly WS", Supplier="ECE Dept", Supplier 1=Digi-Key, Supplier 2=Farnell, Supplier Part Number 2=1717117
F2: library part FS_Fuse_2.0A, "Fuse 2.0A Very Fast Acting 1206 SMD", Manufacturer=MULTICOMP, Manufacturer Part Number="MC12CF 002", Supplier Part Number 1=1841029, Manufacturer PN="MC12CF 002", Storage Location="PCB Assembly WS", Supplier="ECE Dept", Supplier 1=Farnell
GND_BUCK GND_HBR GND_MCU GND_RADIO TP1 TP2: library part TP_1206, "Test-Point 3.3x1.6x2.1mm SMD", Manufacturer="Harwin Inc", Manufacturer Part Number=S1751-46R, Supplier Part Number 1=952-1478-2-ND, Mounting Type="Surface Mount", Storage Location=ProtoPlace, Supplier="ECE Dept", Supplier 1=Digi-Key, Supplier 2=Farnell, Supplier Part Number 2=1826282, Type="PC Test Point"
H1: library part JS_USB_MINI_B_SMT, "USB 2.0, Right Angle, SMT, B Type, Receptacle, 5 Position,", Manufacturer=FCI, Manufacturer PN=10033526-N3212MLF, Supplier Part Number 1=1824416, Storage Location="PCB Assembly WS", Supplier="ECE Dept", Supplier 1=Farnell
H2: library part JA_HDR_IDC_5X2_VERT, "IDC Header, 2,54mm, 10-Pin, Vert", Supplier Part Number 1=1096985, Storage Location="ECE Dept Store", Supplier="ECE Dept", Supplier 1=Farnell
H3 H4 H7 H8 H9 H14 H15: "3Pin Header 2.54mm spacing"
H5 H6: "2 Position Terminal Block 7.62mm spacing"
H10: "IDC Header, 2.54mm, 8-Pin, Vert", Colour=Blue, Current Rating=3A, Manufacturer="Amphenol FCI", Manufacturer Part Number=75869-132LF, Max Operating Temperature=125°C, Max Voltage Rating (AC)=500V, Min Operating Temperature=-65°C, Package Quantity=100, Supplier Part Number 1=609-3530-ND, ComponentLink1Description=http://uk.rs-online.com/webdocs/13ec/0900766b813ecbbf.pdf, ComponentLink1URL=http://uk.rs-online.com/webdocs/13ec/0900766b813ecbbf.pdf, ComponentLink2Description=https://cdn.amphenol-icc.com/media/wysiwyg/files/drawing/75869.pdf, ComponentLink2URL=https://cdn.amphenol-icc.com/media/wysiwyg/files/drawing/75869.pdf, ComponentLink3Description=http://portal.fciconnect.com/Comergent/fci/drawing/75869.pdf, ComponentLink3URL=http://portal.fciconnect.com/Comergent/fci/drawing/75869.pdf, ComponentLink4Description=http://portal.fciconnect.com/Comergent//fci/drawing/75869.pdf, ComponentLink4URL=http://portal.fciconnect.com/Comergent//fci/drawing/75869.pdf, Connector Type="Male Pin", Contact Material=Bronze, Contact Mating Length=0.236inch, Contact Plating=Gold,GXT, Depth=9.55mm, Gender=Male, Housing Colour=Blue, Housing Material=Thermoplastic, Lead Free="Lead Free", Length=17.37mm, Mating Post Length=6mm, Mount="Through Hole", Number of Contacts=8, Number of Positions=8, Number of Rows=2, Orientation=Straight, Packaging=Rail/Tube, Pitch=2.54mm, Pricing 1="1=0.76, 10=0.668, 100=0.5766, 500=0.47178, 1000=0.41936, 5000=0.36694, 10000=0.34859 (USD)", Radiation Hardening=No, REACH SVHC="No SVHC", Row Spacing=0.1inch, Stock 1=8776, Supplier 1=Digi-Key, Termination=Solder, Termination Post Length=3.05mm, Voltage Rating=500V
H11: library part JA_MOLEX_KK_10POS, "CONN HEADER 10POS 2.54mm VERT_ Thru Hole", Supplier Part Number 1=1756828, Storage Location="ECE Dept Store", Supplier="ECE Dept", Supplier 1=Farnell
H12: "Header, 2-Pin", LatestRevisionDate=17-Jul-2002, LatestRevisionNote="Re-released for DXP Platform.", Publisher="Altium Limited"
H13: "Header, 4-Pin", LatestRevisionDate=17-Jul-2002, LatestRevisionNote="Re-released for DXP Platform.", Publisher="Altium Limited"
H16 H17: "Header, 2-Pin, Right Angle", LatestRevisionDate=17-Jul-2002, LatestRevisionNote="Re-released for DXP Platform.", Publisher="Altium Limited"
J1 J2: library part TP_JUMPER, "2.54mm Jumper Thru Hole", Supplier Part Number 1=1097975, No. of Positions=2, No. of Rows=1, Pitch Spacing=2.54, Storage Location="ECE$ Store", Supplier="ECE Dept", Supplier 1=Farnell
L1 L3: library part IN_Ferrite-Bead, "Ferrite Bead, Rdc 0.3R, Z100MHZ 600R, Imax 1A, SMD 1206", DC Current Rating=1, DC Resistance Max=0.08, Ferrite Case Style="1206 ^3216 Metric]", Frequency Range="50MHz to 1", Impedance Tolerance="± 25%", Manufacturer=FAIR-RITE, Manufacturer Part Number=2512066017Y1, Supplier Part Number 1=1612060, Ferrite Mounting=SMD, Impedance=600, Manufacturer PN=2512066017Y1, Storage Location="PCB Assembly WS", Supplier="ECE Dept", Supplier 1=Farnell
L2: library part CDRH104RNP-5R2NC, "FIXED IND 5.2UH 6A 22 MOHM SMD", Current - Saturation=5.6A, DC Resistance (DCR)="22 mOhm Max", Frequency - Self Resonant=-, Manufacturer="Sumida America Components Inc.", Operating Temperature="-40°C ~ 100°C", Package / Case=Nonstandard, Supplier Part Number 1=308-2280-1-ND, Tolerance=±30%, Category="Inductors, Coils, Chokes", ComponentLink1Description=http://products.sumida.com/products/pdf/CDRH104R.pdf, ComponentLink1URL=http://products.sumida.com/products/pdf/CDRH104R.pdf, Height - Seated (Max)="0.157\" (4.00mm)", Manufacturer Part Number=CDRH104RNP-5R2NC, Material - Core=Ferrite, Mounting Type="Surface Mount", Packaging="Cut Tape (CT)", Part Status=Active, Pricing 1="1=2.9, 10=2.678, 100=1.8743, 500=1.5173 (NZD)", Q @ Freq=-, Ratings=-, RoHS="RoHS Compliant", Shielding=Shielded, Size / Dimension="0.402\" L x 0.394\" W (10.20mm x 10.00mm)", Stock 1=3849, Supplier 1=Digi-Key, Supplier Device Package=-, Type=-
Q1: library part TM_SSM3J328R, "MOSFET P-CH 20V 6A SOT23-3", Case/Package=SOT-23-3, Continuous Drain Current (ID)=6A, Drain to Source Breakdown Voltage=-20V, Drain to Source Resistance=47.4mR, Drain to Source Voltage (Vdss)=20V, Gate to Source Voltage (Vgs)=8V, Input Capacitance=840pF, Input Capacitance (Ciss) @ Vds="840pF @ 10V", Manufacturer=Toshiba, Manufacturer Part Number=SSM3J328R,LF, Max Operating Temperature=150°C, Max Power Dissipation=1W, Min Operating Temperature=-55°C, Package / Case="SOT-23-3 Flat Leads", Package Quantity=3000, Power Dissipation=2W, Supplier Device Package=SOT-23F, Supplier Part Number=SSM3J328RLFDKR-ND, ComponentLink1Description=https://datasheet.ciiva.com/11158/ssm3j328r-datasheet-en-20140301-11158652.pdf, ComponentLink1URL=https://datasheet.ciiva.com/11158/ssm3j328r-datasheet-en-20140301-11158652.pdf, Current - Continuous Drain (Id) @ 25° C=6A, Element Configuration=Single, FET Feature="Logic Level Gate, 1.5V Drive", FET Type="MOSFET P-Channel, Metal Oxide", Gate Charge (Qg) @ Vgs="12.8nC @ 4.5V", Mount="Surface Mount", Number of Channels=1, Number of Elements=1, Number of Pins=3, Packaging="Tape and Reel", Power - Max=1W, Pricing="1=0.79, 10=0.658, 25=0.5772, 100=0.4939, 250=0.42836, 500=0.36284, 1000=0.27972 (NZD)", Radiation Hardening=No, Rds On Max=29.8mR, Storage Location="PCB Assembly WS", Supplier=Digi-Key, Supplier 1=Digi-Key, Supplier Part Number 1=SSM3J328RLFDKR-ND, Turn-Off Delay Time=107ns, Turn-On Delay Time=32ns, Vgs(th) (Max) @ Id="1V @ 1mA"
Q2: library part TM_ZXM61N02FTA, "MOSFET N-CH 20V 1.7A SOT23-3", Current - Continuous Drain (Id) @ 25° C=1.7A, Drain to Source Voltage (Vdss)=20V, Input Capacitance (Ciss) @ Vds="160pF @ 15V", Manufacturer="Diodes Inc", Manufacturer Part Number=ZXM61N02FTA, Package / Case="TO-236-3, SC-59, SOT-23-3", Power - Max=625mW, Supplier Part Number 1=9525270, FET Type="MOSFET N-Channel, Metal Oxide", Gate Charge (Qg) @ Vgs="3.4nC @ 4.5V", Pricing="1=0.79, 10=0.658, 25=0.5772, 100=0.4939, 250=0.42836, 500=0.36284, 1000=0.27972 (NZD)", Rds On (Max) @ Id, Vgs="180 mOhm @ 930mA, 4.5V", Storage Location="PCB Assembly WS", Supplier="ECE Dept", Supplier 1=Farnell, Supplier 2=Digi-Key, Supplier Part Number 2=ZXM61N02FCT-ND, Vgs(th) (Max) @ Id="700mV @ 250µA"
R1: library part RS_27K, "RES 27K OHM 1/10W 5% 0603 SMD", Storage Location="PCB Assembly WS", Supplier="ECE Dept"
R2: library part RS_47K, "RES 47.0K OHM 1/10W 5% 0603 SMD", Storage Location="PCB Assembly WS", Supplier="ECE Dept"
R3 R4: library part RS_27R, "RES 27 OHM 1/10W 5% 0603 SMD", Storage Location="PCB Assembly WS", Supplier="ECE Dept"
R5: library part RS_1K, "RES 1.0K OHM 1/10W 5% 0603 SMD", Storage Location="PCB Assembly WS", Supplier="ECE Dept"
R6: library part RS_1K6, "RES 1.6K OHM 1/10W 5% 0603 SMD", Storage Location="PCB Assembly WS", Supplier="ECE Dept"
R7: library part RT_1R, "RES 1R OHM 1/4W 5% 1206 SMD", Storage Location="PCB Assembly WS", Supplier="ECE Dept"
R8 R15 R16 R17 R19 R21 R22 R23 R24 R27 R28 R31 R32 R35 R36: library part RS_0R0, "RES 0.0 OHM 1/10W 5% 0603 SMD", Storage Location="PCB Assembly WS", Supplier="ECE Dept"
R9: library part RS_16K, "RES 16K OHM 1/10W 5% 0603 SMD", Storage Location="PCB Assembly WS", Supplier="ECE Dept"
R10 R20 R29 R30: library part RS_10K, "RES 10.0K OHM 1/10W 5% 0603 SMD", Storage Location="PCB Assembly WS", Supplier="ECE Dept"
R11: library part RS_100K, "RES 100K OHM 1/10W 5% 0603 SMD", Storage Location="PCB Assembly WS", Supplier="ECE Dept"
R12 R13 R14 R18 R26: library part RS_3K, "RES 3K OHM 1/10W 5% 0603 SMD", Storage Location="PCB Assembly WS", Supplier="ECE Dept"
R25 R33: library part RS_4K7, "RES 4.7K OHM 1/10W 5% 0603 SMD", Storage Location="PCB Assembly WS", Supplier="ECE Dept"
S1 S2: library part WS_EVQPNF05M, "Panasonic 6 x 3.5mm SMD Light Touch Switch Type SMD", Manufacturer=Panasonic, Supplier Part Number 1=2079481, Manufacturer PN=EVQPNF05M, PackageDescription="6.0 x 3.5 mm", Storage Location="PCB Assembly WS", Supplier="ECE Dept", Supplier 1=Farnell, Supplier 2=Digi-Key, Supplier Part Number 2=P13598SCT-ND
S3: "DIP Switch, 4 Position, SPST SMD", Contact Current DC Max=25, Manufacturer="OMRON ELECTRONIC COMPONENTS", Manufacturer Part Number=A6SN-4101, Supplier Part Number 1=2029425, Contact Configuration=SPST, External Length / Height=12.1, No. of Switch Positions=4, Pitch Spacing=2.54, Storage Location="PCB Assembly WS", Supplier="ECE Dept", Supplier 1=Farnell
U1: library part SE_ATSAM4S16BA-MU, "IC MCU 32BIT 512KB FLASH 64LQFP", Manufacturer=Atmel, Package / Case=64-LQFP, Supplier Part Number 1=ATSAM4S8BA-ANRCT-ND, Voltage - Supply (Vcc/Vdd)="1.62 V ~ 3.6 V", Code_JEDEC=MO-220VMMD-3, ComponentLink1Description="Manufacturer URL", ComponentLink1URL=http://www.atmel.com/, ComponentLink2Description="SAM4S Series Datasheet", ComponentLink2URL=http://www.atmel.com/dyn/resources/prod_documents/11100.pdf, ComponentLink3Description="SAM4S Series Summary", ComponentLink3URL=http://www.atmel.com/dyn/resources/prod_documents/11100S.pdf, Connectivity="I²C, IrDA, Memory Card, SPI, SSC, UART/USART, USB", Core Processor="ARM® Cortex®-M4", Core Size=32-Bit, Data Converters="A/D 11x12b, D/A 2x12b", Manufacturer Part Number=ATSAM4S8BA-ANR, Number of I/O=47, PackageDescription="64-Pin Quad Flat No-Lead (QFN) Sawn, 9 x 9 x 1.0 mm Body, 0.5 mm Pitch, Exposed Pad", PackageReference=64PS, PackageVersion="revJ, Jul-2007", Packaging="Cut Tape (CT)", Peripherals="Brown-out Detect/Reset, DMA, POR, PWM, WDT", Program Memory Size="512KB (512K x 8)", Program Memory Type=FLASH, RAM Size="128K x 8", Speed=120MHz, Supplier 1=Digi-Key
U2: library part ADP2302ARDZ-5.0-R7, "IC REG BUCK 5V 2A 8SOIC", Current - Output=2A, Frequency - Switching=700kHz, Supplier Part Number 1=ADP2302ARDZ-5.0-R7CT-ND, Voltage - Input (Max)=20V, Voltage - Output (Min/Fixed)=5V, Manufacturer_Part_Number=ADP2302ARDZ-5.0-R7, Output Type=Fixed, Supplier 1=Digi-Key, Type=DEV, Vendor="Analog Devices Inc"
U3 U7: library part SV_CAT6219-330TDGT3, "IC REG LIN 3.3V 500MA TSOT23-5", Base Part Number=CAT6219, Current - Output=500mA, Manufacturer Part Number=CAT6219-330TDGT3, Package / Case="SOT-23-5 Thin, TSOT-23-5", Supplier Device Package=TSOT-23-5, Supplier Part Number=CAT6219-330TDGT3CT-ND, Voltage - Input (Max)=5.5V, Voltage - Output (Min/Fixed)=3.3V, Voltage Dropout (Max)="0.5V @ 500mA", ComponentLink1Description=http://www.onsemi.com/pub/Collateral/CAT6219-D.PDF, ComponentLink1URL=http://www.onsemi.com/pub/Collateral/CAT6219-D.PDF, Supplier=Digi-Key, Supplier 1=Digi-Key
U4: "Dual H-Bridge Motor Driver 1.5A"
U5 U8: "1.8V - 5V level converter"
U6: library part NRF24, "nRF24 SMD Module", Warning="No power planes near or under device"
Y1: library part XT_CRYSTAL_12MHz_18pF, "CRYSTAL 12MHZ 18PF 6X3.5mm SMD", ESR (Equivalent Series Resistance)="60 Ohm", Frequency Stability=±50ppm, Frequency Tolerance=±30ppm, Load Capacitance=18pF, Manufacturer="CTS-Frequency Controls", Manufacturer Part Number=406C35D12M00000, Operating Mode=Fundamental, Operating Temperature="-20°C ~ 70°C", Package / Case="4-SMD, No Lead (DFN, LCC)", Supplier Part Number 1=CTX855CT-ND, Frequency=12MHz, Height="0.047\" (1.20mm)", Mounting Type="Surface Mount", Size / Dimension="0.236\" L x 0.138\" W (6.00mm x 3.50mm)", Supplier 1=Digi-Key

## Via types
v1: diameter 1, hole 0.5, Top Side to Bottom Side, 145 vias
v2: diameter 1.27, hole 0.711, Top Side to Bottom Side, 19 vias
v3: diameter 2.2, hole 1.6, Top Side to Bottom Side, 1 vias
v4: diameter 2, hole 1.5, Top Side to Bottom Side, 1 vias

## Nets (pads, with @x,y where several pads share a name; then routed paths per layer and width w, separated by ;. In a path a pad name is that pad's centre, name@x,y a point inside that pad or via, vN(x,y) a via of type N, cw(c..) or ccw(c..) an arc to the next point about the centre after c; other vN are vias at no path point)
3V3: 3V3.1 C5.2 C7.2 C9.2 C11.2 C13.2 C24.2 DL1.2 DL2.2 H11.9 R15.1 R21.1 R23.2 R24.2 R25.2 R33.2 R36.2 S3.7 S3.8 TP1.1 U1.1 U1.7 U1.18 U1.45 U1.58 | length 52.4
  Top Side w0.25: C13.2@35.45,67.1 C13.2@35.5,67.1
  Top Side w0.3: U1.18@26.475,63.25 27.514,63.25 28.05,63.786 v1(28.05,63.95) ; v1(31.773,68.7) C5.2@32.875,68.7 32.75,68.575 U1.7@32.75,65.525 32.75,64.486 32.761,64.475 32.881,64.475 32.906,64.45 35.7,64.45 35.75,64.5 U1.1@35.75,65.525 35.75,66.7 C13.2@35.45,67.1 ; v1(32.95,56.425) 33.8,56.425 34.225,56 34.225,54.5 U1.45@34.25,54.475 ; v1(35.575,60.95) 35.775,60.75 U1.58@37.525,60.75
  Top Side w0.6: R24.2@13.425,40.675 15.325,40.675 v1(15.525,40.475) 15.475,40.425 R15.1@15.475,38.35 ; v1(15.6,42.575) 15.677,42.498 16.702,42.498 DL2.2@17.4,41.8 DL1.2@17.4,40.5 ; R21.1@15.95,51.425 15.95,51.325 16,51.275 17.092,51.275 17.467,50.9 v1(17.85,50.9) 17.773,50.823 17.773,50.148 17.15,49.525 R23.2@17.15,49.425 ; R25.2@53.6,45.125 v1(53.6,46.7) 53.6,46.9 53.877,46.623 54.85,46.623 55.125,46.349 55.125,45.725 R33.2@55.15,45.7
  Top Side w1: v1(18.4,47.6) 18.45,47.65 3V3.1@20.5,47.65 ; v1(29.15,49.875) 29.2,49.825 30.67,49.825 S3.8@30.72,49.875 S3.8@30.75,49.845 ; S3.7@33.26,49.875 33.36,49.775 33.36,47.74 33.625,47.475 v1(33.625,47.45) ; TP1.1@52.725,51.275 v1(56.025,51.275) ; R36.2@55.075,38.075 v1(55.075,39.875)
  Bottom Side w0.3: v1(28.05,63.95) 28.439,63.95 28.864,63.525 C7.2@29.564,63.525 ; v1(32.95,56.425) 34.275,56.425 C9.2@34.3,56.4 ; C11.2@34.15,59.825 34.15,60.425 34.675,60.95 v1(35.575,60.95)
  Bottom Side w1: C24.2@31.975,47.55 32.075,47.45 v1(33.625,47.45)
3V3_PROG: H2.7 H2.8 S3.2 | length 29.1
  Top Side w1: v1(32.075,43.275) 32.075,42.86 33.26,41.675 S3.2@33.26,40.975 ; v1(43.925,48.7) 43.975,48.7 45.675,47 v2(50.95,47) 50.963,47.014 50.963,48.934 v2(50.977,48.948)
  Bottom Side w0.4: v1(32.075,43.275) 34.575,45.775 34.575,48.4 36.075,49.9 42.725,49.9 v1(43.925,48.7)
3V3_RADIO: L3.2 R19.2 R35.2 | length 10.1
  Top Side w0.6: L3.2@4.15,62.35 4.15,62.75 3.35,63.55 3.35,69.125 4.375,70.15 4.375,71.575 R19.2@4.425,71.625
3V3_REG: 3V3_REG.1 C32.2 S3.1 U3.5 | length 9.7
  Top Side w0.3: C32.2@18.525,32.5 C32.2@18.625,32.6
  Top Side w0.6: 3V3_REG.1@16.4,35.025 17.55,35.025 18.273,34.302 v1(18.701,34.302) C32.2@18.7,32.45 C32.2@18.7,32.45 18.75,32.5 19.817,32.5 19.942,32.625 v1(20.05,32.625) ; U3.5@17.1,32.5 C32.2@18.525,32.5
  Top Side w1: v1(29.25,41.95) 29.425,41.775 30.62,41.775 30.72,41.675 S3.1@30.72,40.975
5V: 5V.1 C2.2 C26.2 C27.2 C31.2 C33.2 C36.2 C37.2 C41.2 C44.2 C47.2 C48.2 H4.1 H9.1 H13.1 H14.2 H15.2 R16.2 R22.2 S3.5 S3.6 U3.1 U3.3 U7.1 | length 59.7
  Top Side w0.6: v1(5,47.95) 5,49.55 6.425,50.975 7.075,50.975 R22.2@7.1,51 ; v1(5.25,35.625) 6.2,36.575 6.825,36.575 6.975,36.425 R16.2@6.975,36.525 ; v1(5.35,56.05) 6.675,56.05 6.925,56.3 C33.2@6.925,56.35 ; C33.2@7.15,56.475 U7.1@7.15,57.85 ; v1(11.675,33.775) 12.825,32.625 C31.2@12.875,32.625 12.875,32.525 12.9,32.5 U3.1@14.4,32.5 14.911,32.5 15.375,32.036 15.375,31.064 14.911,30.6 U3.3@14.4,30.6
  Top Side w0.8: C27.2@1.9,31.875 1.9,34.16 H4.1@1.925,34.185 ; H9.1@1.9,44.735 1.925,44.71 C37.2@1.925,42.725 ; H14.2@3.7,6.1 3.725,6.075 C47.2@6,6.075 8.525,8.6 5V.1@9.925,8.6 9.875,8.65 C48.2@9.875,12.325 ; H15.2@3.725,14.775 3.775,14.725 C41.2@5.875,14.725
  Top Side w0.9: H13.1@1.9,60.48 C44.2@1.9,62.375
  Top Side w1: H9.1@1.9,44.735 6.073,44.735 C2.2@6.18,44.842 ; H4.1@1.925,34.185 3.99,34.185 5.03,33.145 C36.2@7.167,33.145 ; C41.2@5.875,14.725 8.275,12.325 C48.2@9.875,12.325 ; v1(35.425,47.5) 35.7,47.775 35.7,49.775 S3.6@35.8,49.875 ; S3.5@38.44,49.765 S3.5@38.34,49.865 38.34,46.636 38.75,46.226 v1(38.75,45.475)
  Bottom Side w1: v1(35.425,47.5) 37.05,47.5 37.1,47.45 C26.2@37.1,47.4 C26.2@37.1,47.375
5V_BUCK: 5V_BCK.1 C17.2 C18.2 C19.2 C23.2 L2.2 S3.3 U2.5 | length 7.1
  Top Side w0.3: C23.2@9.4,22.3 C23.2@9.6,22.5
  Top Side w0.6: C17.2@13.35,27.4 C18.2@14.8,27.4 14.805,27.405 U2.5@16.689,27.405 ; v1(34.952,39.202) 34.963,39.191 35.788,39.191 ; S3.3@35.8,40.975 35.788,40.963 35.788,39.191 ; v1(36.225,38.5) 36.225,38.754 35.788,39.191
  other v2: 11.25,20.45 9.35,20.5 13.175,22.675 10.7,26.975
ACTUATOR: ACTUATOR.1 Q2.1 R29.2 U1.13 | length 51
  Top Side w0.3: U1.13@29.75,65.525 29.75,61.764 37.475,54.039 37.475,52.544 38.554,51.465 39.064,51.465 40.315,50.214 40.315,49.924 v1(41.7,48.54) ; v1(46.525,41.7) 47,41.7 54.6,34.1 57.275,34.1 R29.2@58.425,32.95 ; Q2.1@58.425,31.275 R29.2@58.425,32.95 ; ACTUATOR.1@60.9,32.35 59.75,32.35 59.2,32.9 58.475,32.9 R29.2@58.425,32.95
  Bottom Side w0.3: v1(41.7,48.54) 46.525,43.715 v1(46.525,41.7)
BUMPER_SENSOR: C52.2 R26.1 U1.14 | length 16.8
  Top Side w0.3: U1.14@29.25,65.525 29.25,66.7 28.05,67.9 27.925,68.025 27.925,78.55 29.25,79.875 R26.1@29.25,81.2
D_N: H1.2 R4.1 | length 17.3
  Top Side w0.381: R4.1@42.9,57.525 42.9,57.625 43.059,57.784 43.568,57.784 43.579,57.795 44.482,57.795 48.477,61.791 48.477,64.904 50.798,67.225 H1.2@54.273,67.225
D_P: H1.3 R3.1 | length 17.2
  Top Side w0.381: R3.1@42.95,58.775 42.95,58.675 43.109,58.515 44.304,58.515 47.842,62.054 47.842,65.167 50.701,68.026 54.176,68.026 H1.3@54.2,68.05